# Altium PCB PCB1.PcbDoc (part 1 of 3)
Units mil, origin at the board's own origin, x right, y up, seen from the top; angles counter-clockwise.
Board outline 2560 x 1880 mil, 4 copper layers (Top Layer, GND, VCC, Bottom Layer), stack 23.756 mil thick; 154 components, 113 nets, 515 pads, 218 vias.
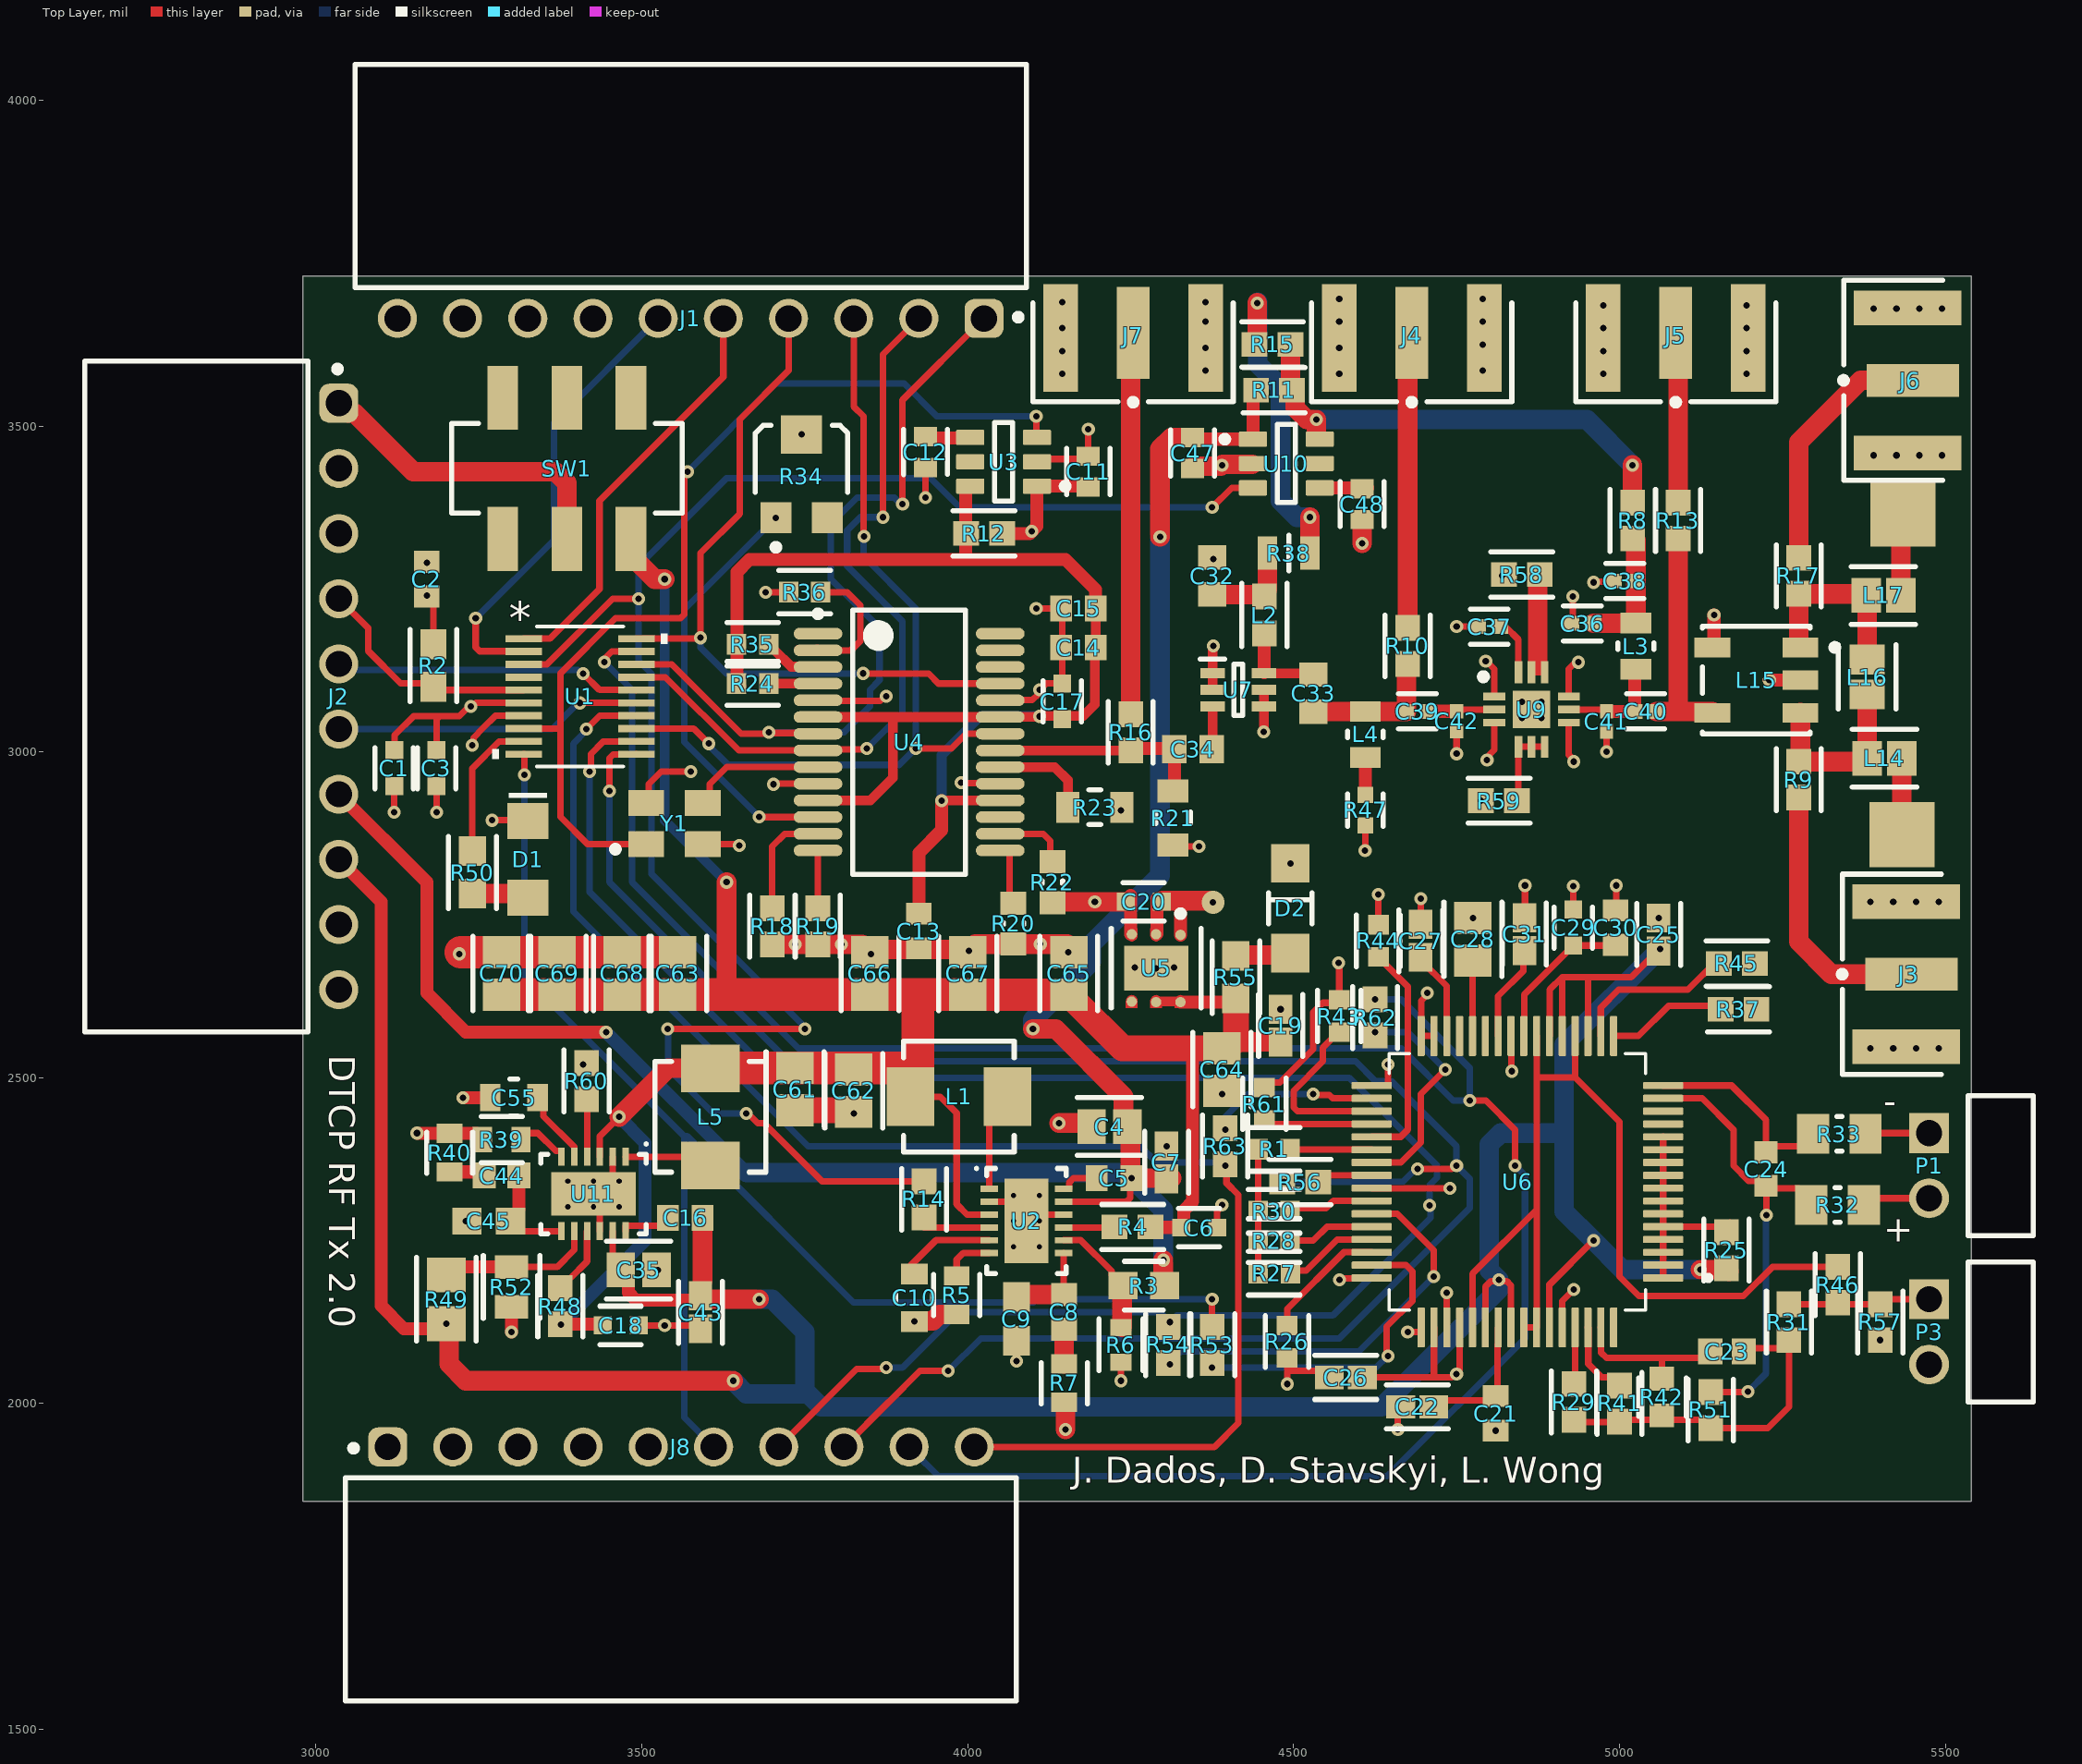
[diagram p0: Top Layer view]
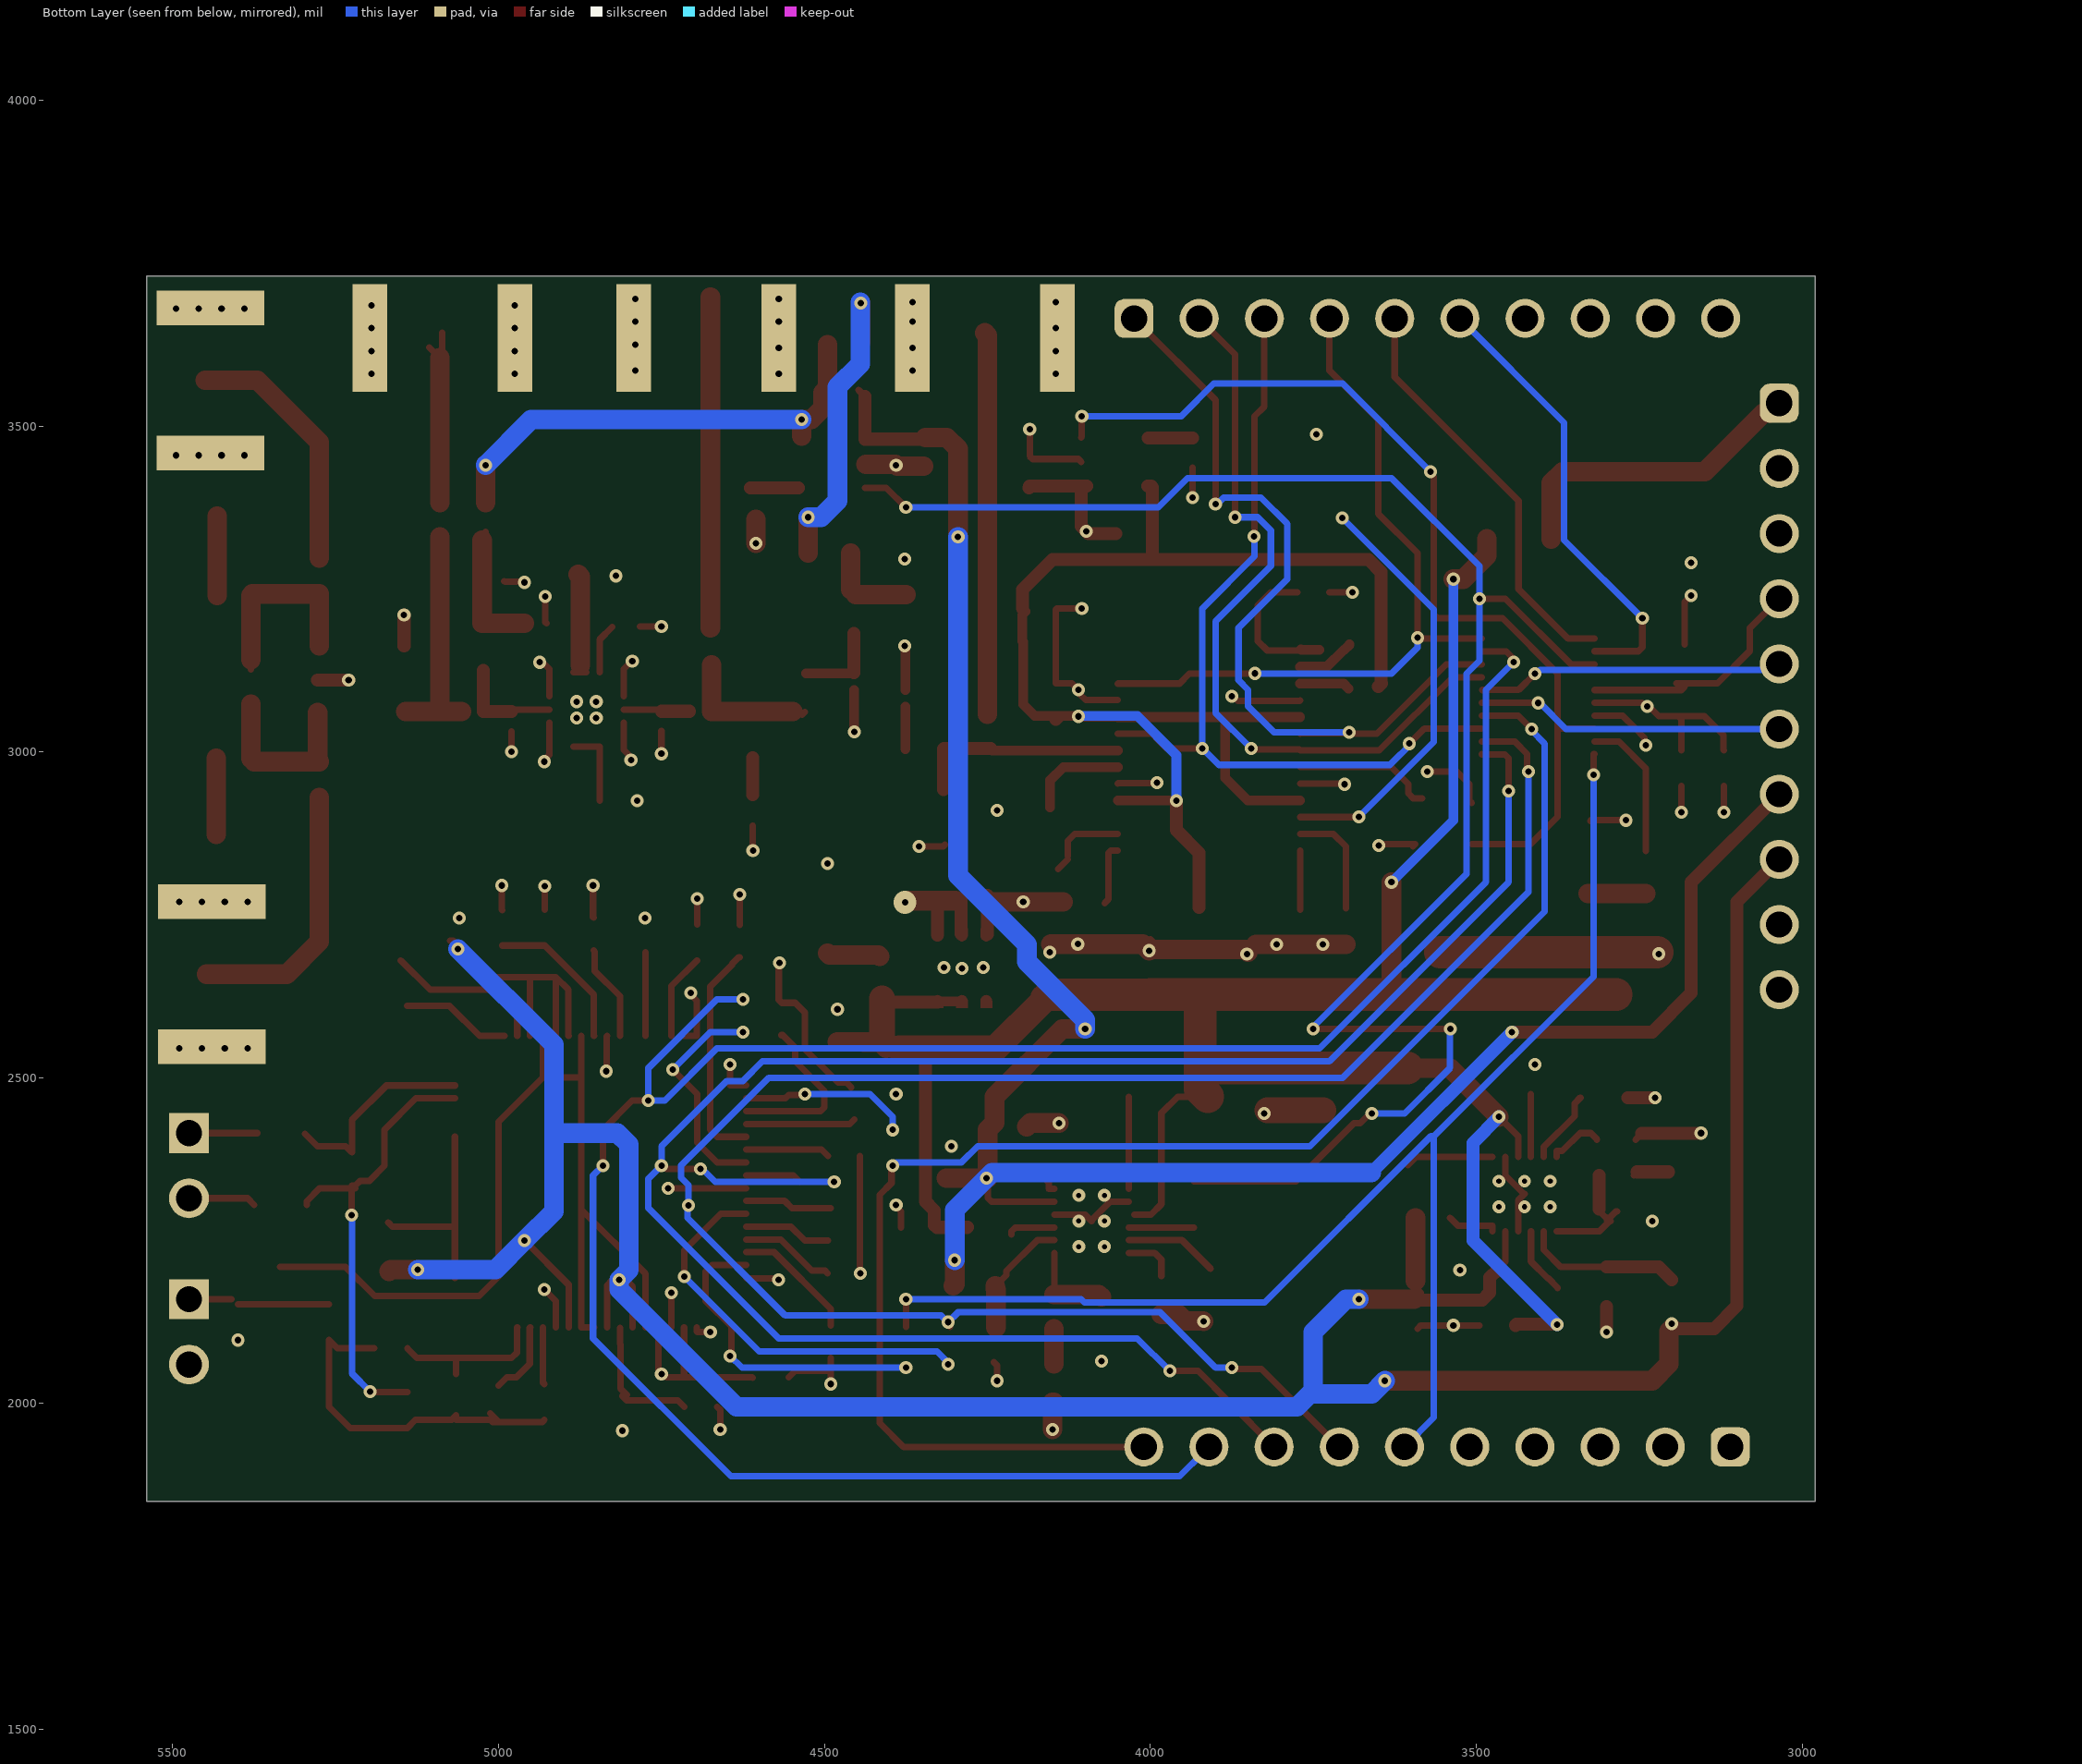
[diagram p1: Bottom Layer view, seen from below]
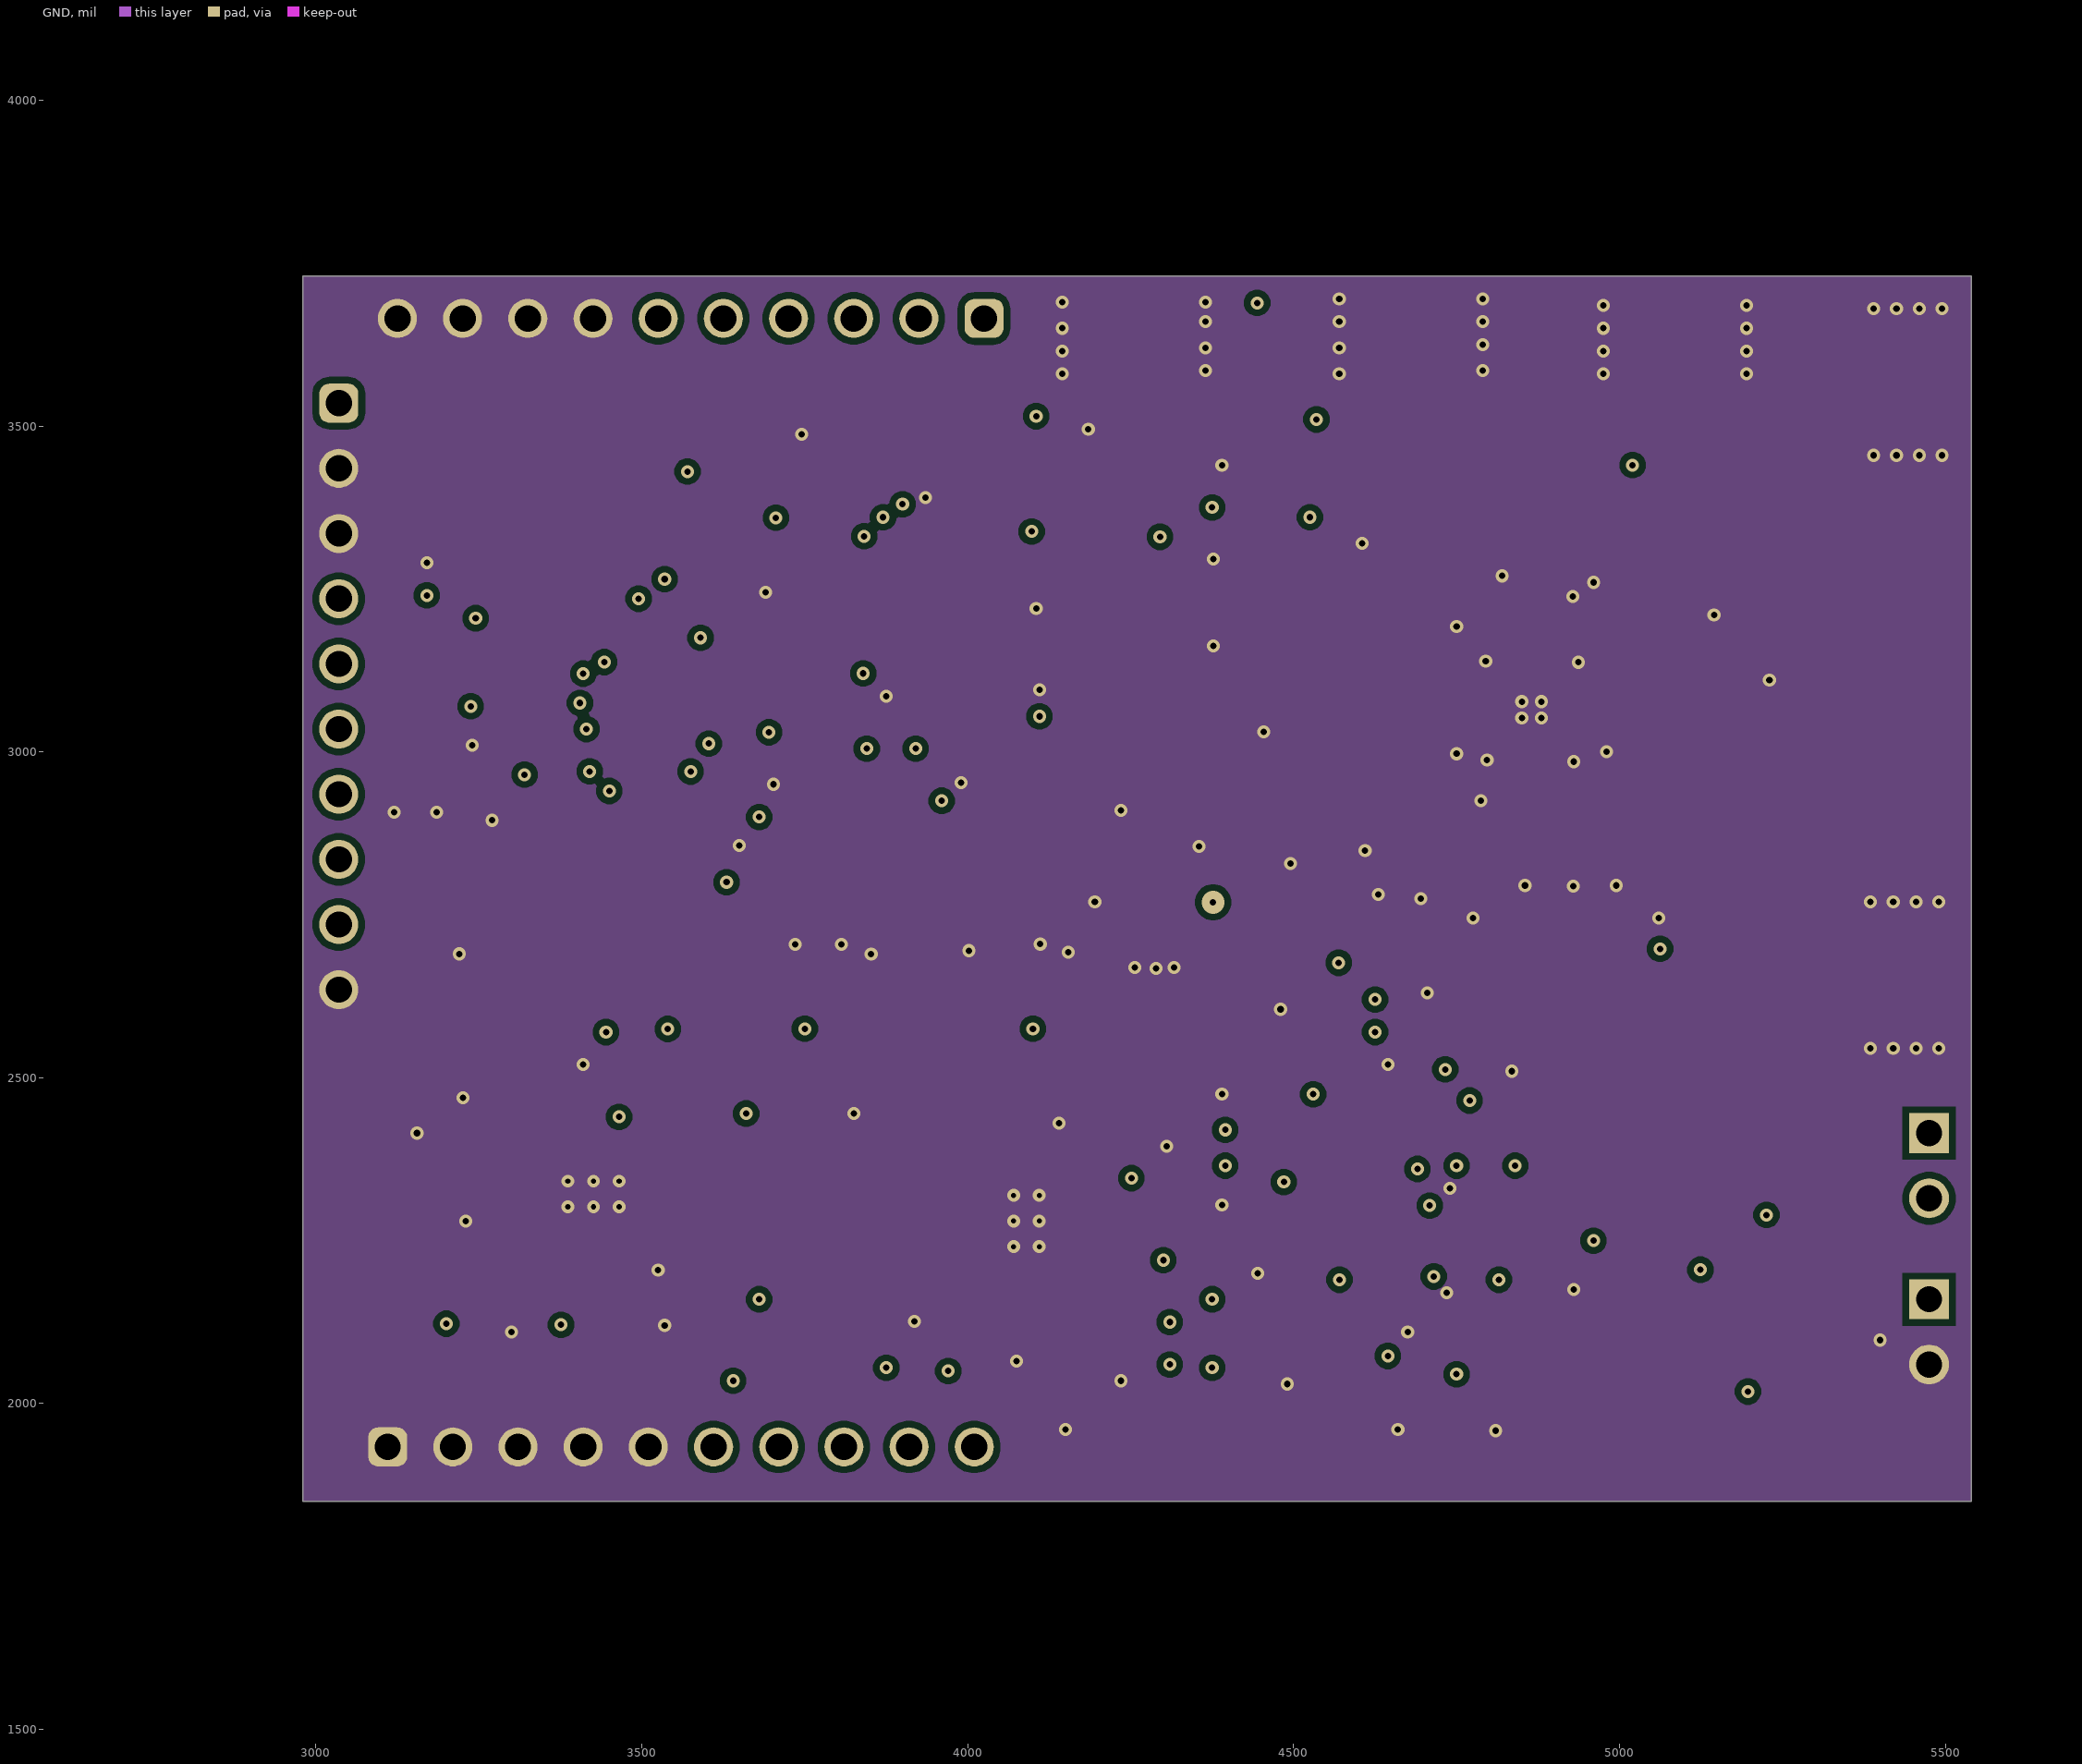
[diagram p2: GND]
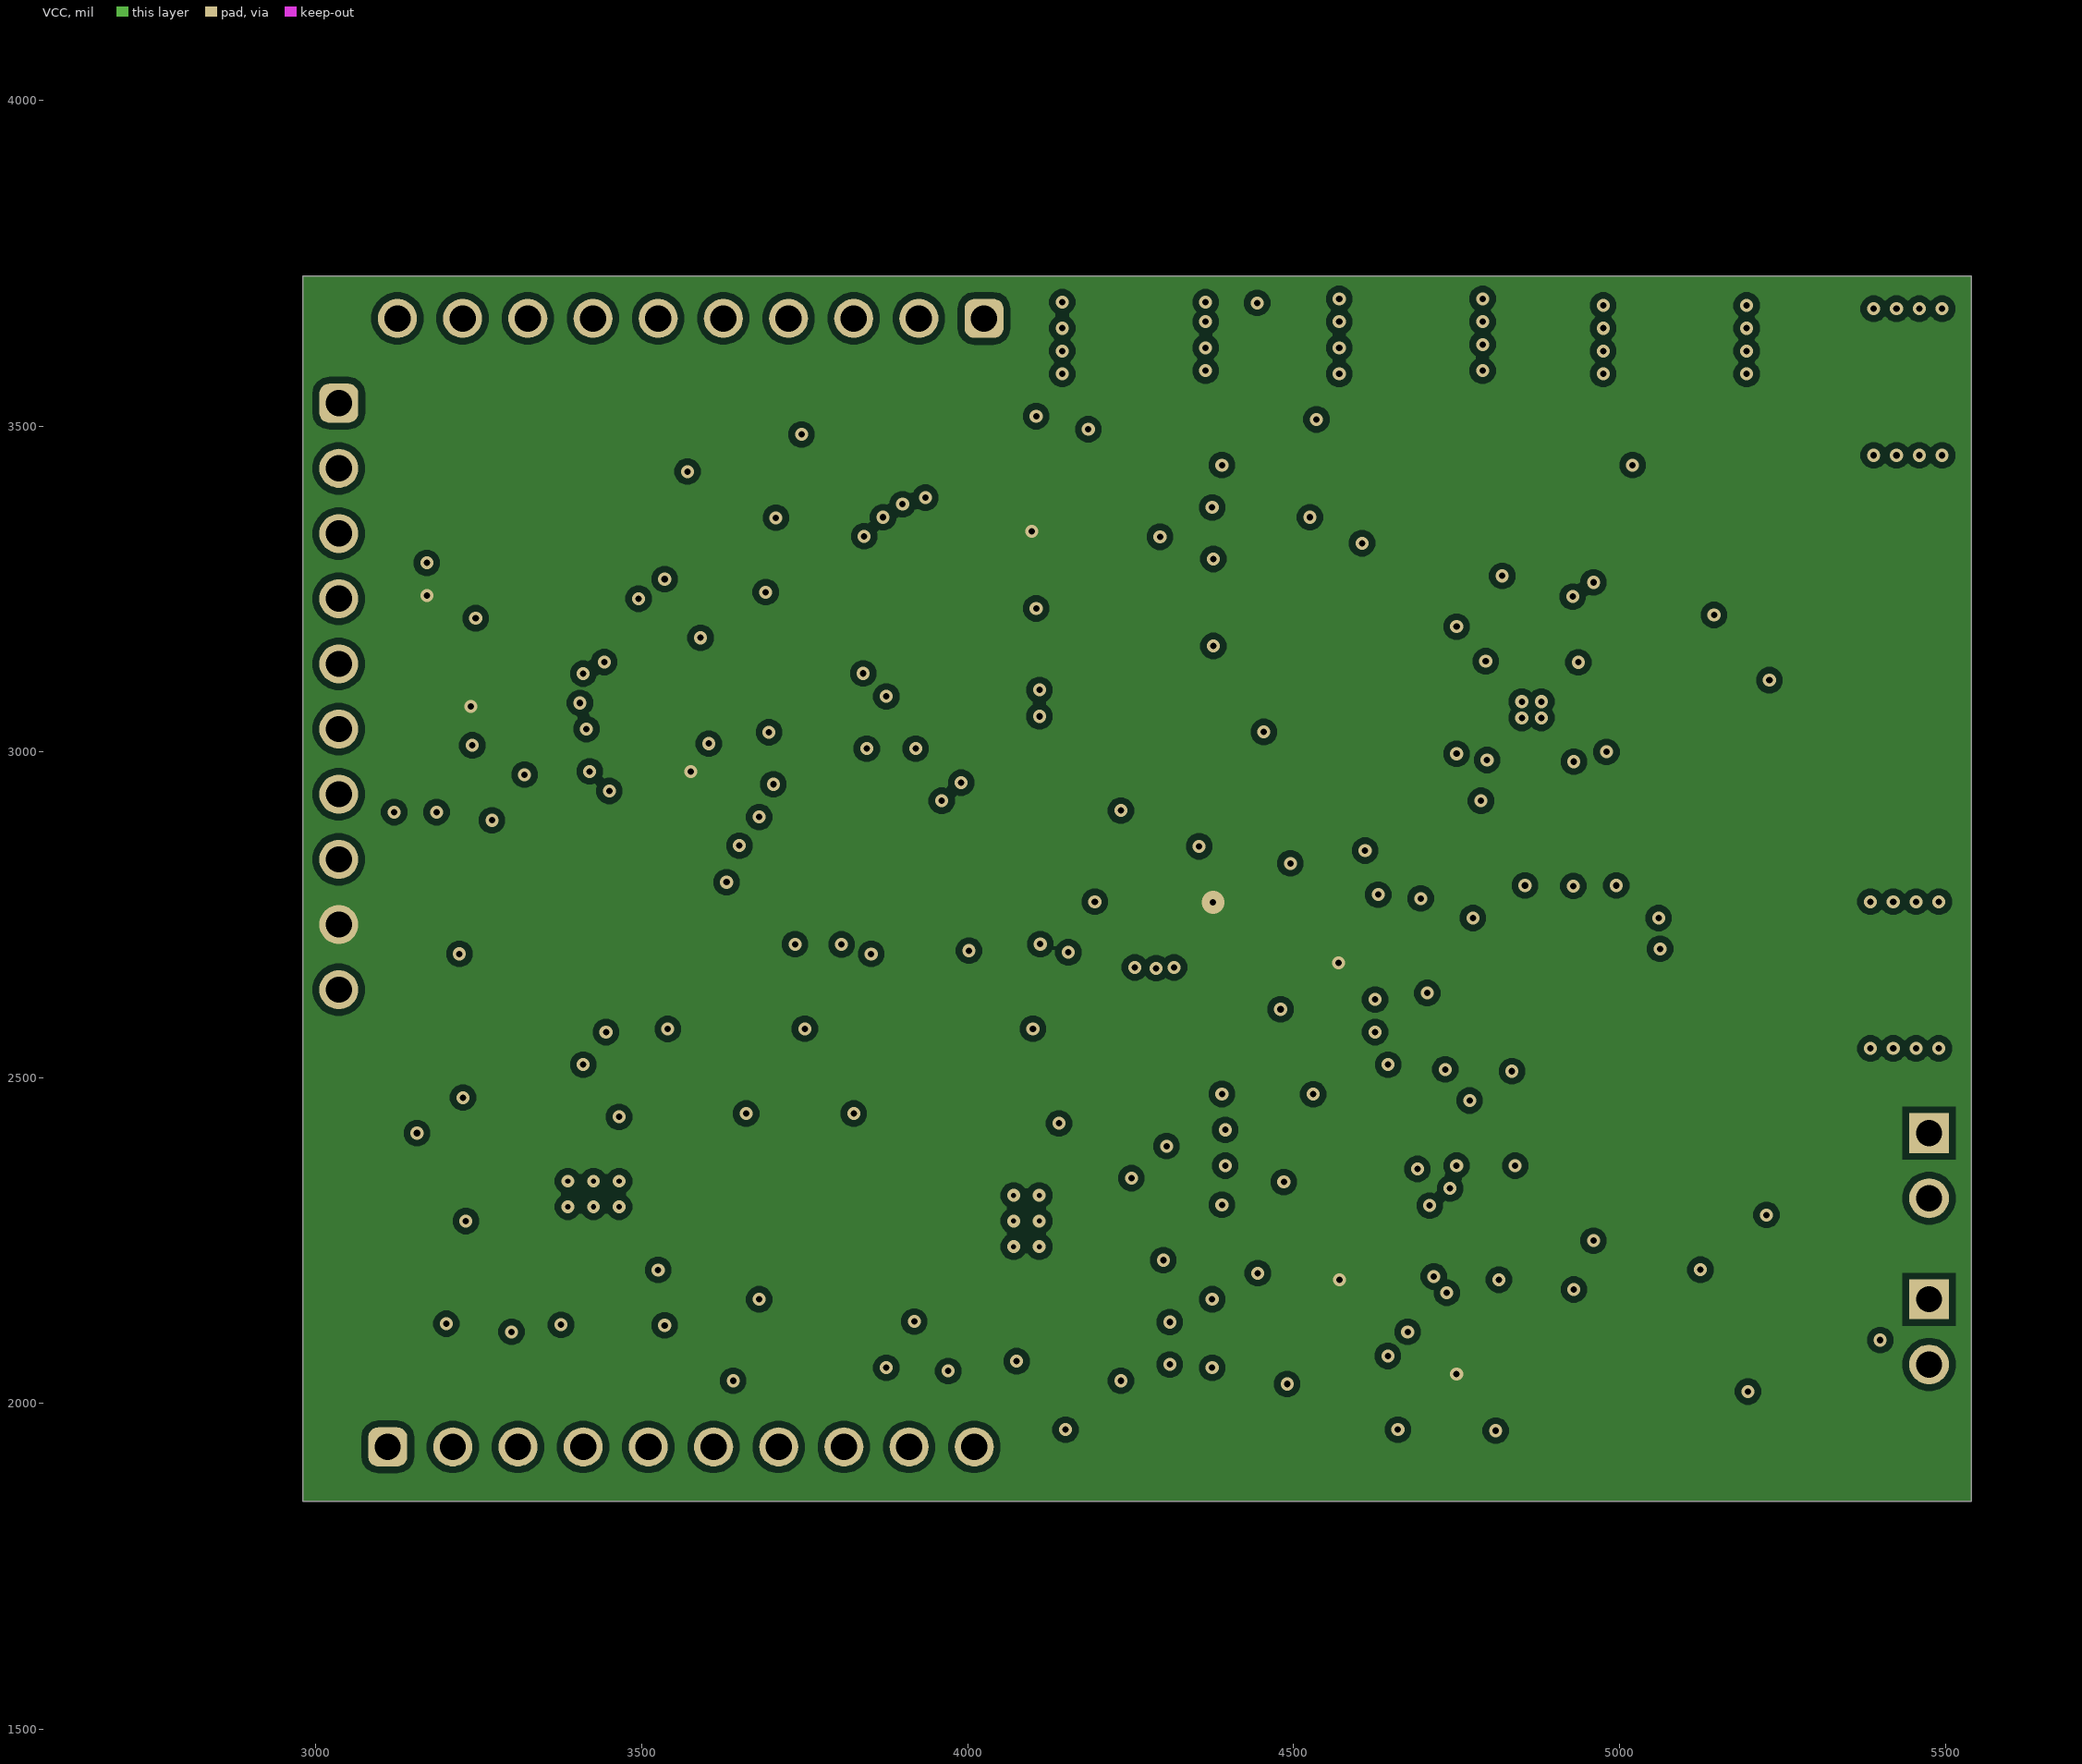
[diagram p3: VCC]
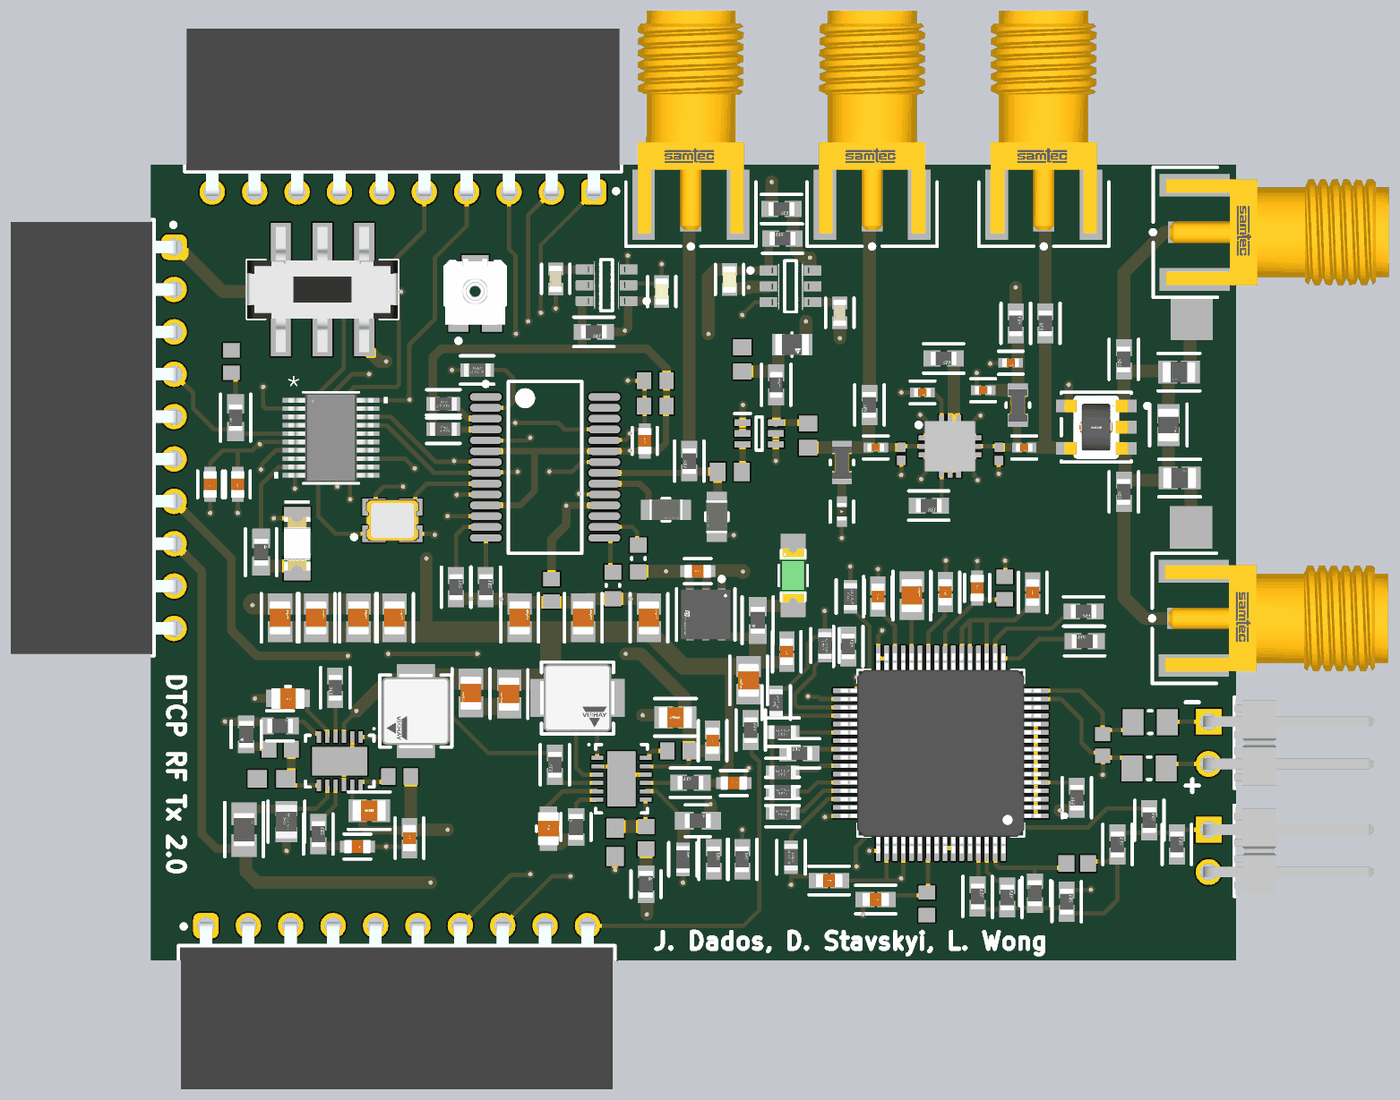
[diagram p5: 3D render of the assembled board from above, using the file's embedded part models]

## Layer stack, top to bottom
Top Solder: solder mask 0.4, Solder Resist, Dk 3.5
Top Layer: signal copper 1.4
Dielectric 2: prepreg 2.8, PP-006, Dk 4.1
GND: signal copper 1.378
Dielectric 1: dielectric 12.6, FR-4, Dk 4.8
VCC: signal copper 1.378
Dielectric 3: prepreg 2.8, PP-006, Dk 4.1
Bottom Layer: signal copper 1.4
Bottom Solder: solder mask 0.4, Solder Resist, Dk 3.5

## Board outline
2980,1850 2980,3730 5540,3730 5540,1850

## Design rules (kind name [scope] priority, off if disabled: settings)
Clearance [All] p1: gap=10 ignorepadtopadclearanceinfootprint=FALSE except(0: Arc-Hole Track-Hole SMDPad-Hole THPad-Hole Via-Hole Fill-Hole Poly-Hole Region-Hole Text-Hole; 2: SMDPad-SMDPad; 5: Arc-Arc Arc-Track Arc-SMDPad Track-Track Track-SMDPad; 20: Arc-Fill Arc-Poly Arc-Region Track-Fill Track-Poly Track-Region Fill-Fill Fill-Poly Fill-Region Poly-Poly Poly-Region Region-Region)
PlaneClearance [All] p1: clearance=40
PolygonConnect [All] p1: connectstyle=Direct reliefconductorwidth=10 reliefentries=4 polygonreliefangle="90 Angle" airgapwidth=10
RoutingVias [All] p1: holewidth=28 width=50 viastyle="Through Hole" minholewidth=28 minwidth=50 maxholewidth=28 maxwidth=50
SolderMaskExpansion [All] p1: expansion=4 istentingtop=FALSE
SupplyNets "Schematic Supply Nets_8" [InNet('3V3')] p1: voltage=0.000
SupplyNets "Schematic Supply Nets_7" [InNet('3V3DDS')] p2: voltage=0.000
SupplyNets "Schematic Supply Nets_6" [InNet('13V0')] p3: voltage=0.000
SupplyNets "Schematic Supply Nets_5" [InNet('13V0PA')] p4: voltage=0.000
SupplyNets "Schematic Supply Nets_4" [InNet('VBAT')] p5: voltage=0.000
SupplyNets "Schematic Supply Nets_3" [InNet('GND')] p6: voltage=0.000
SupplyNets "Schematic Supply Nets_2" [InNet('AFE_AGND')] p7: voltage=0.000
SupplyNets "Schematic Supply Nets_1" [InNet('PA1_VDD')] p8: voltage=0.000
SupplyNets "Schematic Supply Nets" [InNet('5V0')] p9: voltage=0.000
Width [All] p1: maxlimit=80 minlimit=10 preferedwidth=10
29 further rules are at their usual default settings.

## Classes and differential pairs
component class "U_Boost 5V": C16 C18 C35 C43 C44 C45 C55 L5 R39 R40 R48 R49 R52 R60 U11
component class U_Switch2: C47 C48 U10
component class U_Switch1: C11 C12 U3
component class "U_PA stage 2": C36 C37 C38 C39 C40 C41 C42 L3 L4 R47 R58 R59 U9
component class "U_PA stage 1": C32 C33 C34 L2 R38 U7
component class U_Output: L14 L15 L16 L17
component class U_LDO: C19 C20 U5
component class U_DDS: C13 C14 C15 C17 R18 R19 R20 R21 R22 R23 R24 R34 R35 R36 U4 Y1
component class U_AFE: C21 C22 C23 C24 C25 C26 C27 C28 C29 C30 C31 R1 R25 R26 R27 R28 R29 R30 R31 R32 R33 R37 R41 R42 R43 R44 R45 R46 R51 R53 R54 R56 R57 R61 R62 R63 U6
component class U_MCU: C1 C2 C3 D1 R2 R50 U1
component class System: C61 C62 C63 C64 C65 C66 C67 C68 C69 C70 D2 J1 J2 J3 J4 J5 J6 J7 J8 P1 P3 R8 R9 R10 R11 R12 R13 R15 R16 R17 R55 SW1
component class "U_Boost 12V": C4 C5 C6 C7 C8 C9 C10 L1 R3 R4 R5 R6 R7 R14 U2

## Components (designator, comment, footprint, x,y, rotation, side; value= is the part's Value field where it differs from the comment)
C1 "C1608X5R1A106K080AC" FP-C1608-080-0_1-MFG 3120,2975 r90 top
C2 "VJ0603Y104KXJAP" CAPC1608X92X38NL15T08 3170,3265 r270 top
C3 "C1608X5R1A106K080AC" FP-C1608-080-0_1-MFG 3185,2975 r90 top
C4 "CC0805MKX5R8BB226" FP-CC0805-0_2-1_45-IPC_C 4217.41,2425 r180 top
C5 "VJ0603Y104KXJAP" CAPC1608X92X38NL15T08 4224.57,2345.87 r0 top
C6 "C1608X5R1A106K080AC" FP-C1608-080-0_1-MFG 4355,2270 r180 top
C7 "C1608X5R1H105K080AB" FP-C1608-080-0_1-IPC_B 4305,2370 r90 top
C8 "C0603C331J5GALTU" CAPC1608X87X35NL15T15 4147.99,2140.87 r90 top
C9 "VJ0603A100KXAAC" CAPC1608X92X38ML12T08 4075,2130 r90 top
C10 "C2012X5R1E475K125AB" FP-C2012-125-0_2-MFG 3917.99,2162.28 r270 top
C11 "C0603C106M8PACTU" FP-C0603C106M8PACTU-MFG 4185,3430 r270 top
C12 "C0603C101K4GAC7867" FP-C0603C-CF-MFG 3935,3460 r90 top value="100 pF"
C13 "VJ0603Y104KXJAP" CAPC1608X92X38NL15T08 3925,2725 r90 top
C14 "VJ0603Y104KXJAP" CAPC1608X92X38NL15T08 4170,3160 r0 top
C15 "VJ0603Y104KXJAP" CAPC1608X92X38NL15T08 4170,3220 r0 top
C16 "VJ0603Y104KXJAP" CAPC1608X92X38NL15T08 3566.57,2285 r0 top
C17 "C1608X5R1A106K080AC" FP-C1608-080-0_1-MFG 4145,3077.44 r270 top
C18 "C1608X5R1A106K080AC" FP-C1608-080-0_1-MFG 3467.44,2120 r180 top
C19 "C1608X5R1H105K080AB" FP-C1608-080-0_1-IPC_B 4480,2580 r90 top
C20 "C1608X5R1A106K080AC" FP-C1608-080-0_1-MFG 4270,2770 r0 top
C21 "VJ0603Y104KXJAP" CAPC1608X92X38NL15T08 4810,1985 r270 top
C22 "C1608X5R1H105K080AB" FP-C1608-080-0_1-IPC_B 4689.78,1995 r180 top
C23 "VJ0603Y152JXACW1BC" CAPC1608X95X40NL15T15 5165,2080 r180 top
C24 "06035C472KAZ2A" CAPC1608X90X35LL15T15 5225,2360 r90 top
C25 "C1608X5R1H105K080AB" FP-C1608-080-0_1-IPC_B 5060,2719.78 r90 top
C26 "C1608X5R1H105K080AB" FP-C1608-080-0_1-IPC_B 4580,2040 r180 top
C27 "C1608X5R1H105K080AB" FP-C1608-080-0_1-IPC_B 4695,2710 r90 top
C28 "GRM21BR60J107ME15K" FP-GRM21B-0_2-e0_2_0_7-IPC_B 4775,2712.51 r90 top
C29 "C1608X5R1A106K080AC" FP-C1608-080-0_1-MFG 4929.1,2730.39 r270 top
C30 "VJ0603Y104KXJAP" CAPC1608X92X38NL15T08 4994.1,2730.39 r270 top
C31 "C1608X5R1H105K080AB" FP-C1608-080-0_1-IPC_B 4854.1,2720.39 r90 top
C32 "VJ0603Y183KXAAC" CAPC1608X92X38ML15T08 4375,3270 r90 top
C33 "VJ0603Y183KXAAC" CAPC1608X92X38ML15T08 4530,3090 r270 top
C34 "VJ0603Y183KXAAC" CAPC1608X92X38ML15T08 4345.59,3004.41 r0 top
C35 "CC0805MKX5R8BB226" FP-CC0805-0_2-1_45-IPC_C 3495,2205 r0 top
C36 "GRM155R71H104KE14D" FP-GRM155-0_05-IPC_B 4943.21,3197.09 r0 top
C37 "GRM155R71H104KE14D" FP-GRM155-0_05-IPC_B 4800.08,3192.09 r0 top
C38 "GRM1555C1H102JA01D" FP-GRM155-0_05-IPC_B 5008.21,3262.09 r0 top
C39 "GRM1555C1H102JA01D" FP-GRM155-0_05-IPC_B 4690.08,3062.09 r0 top
C40 "GRM1555C1H102JA01D" FP-GRM155-0_05-IPC_B 5040.08,3062.09 r0 top
C41 "GRM1555C1HR40WA01D" CAPC1005X55X25LL05T10 4980.08,3046.73 r90 top
C42 "GRM1555C1HR40WA01D" CAPC1005X55X25LL05T10 4750.08,3047.09 r90 top
C43 "C1608X5R1H105K080AB" FP-C1608-080-0_1-IPC_B 3590,2140 r270 top
C44 "C0603C331J5GALTU" CAPC1608X87X35NL15T15 3285,2350 r0 top
C45 "VJ0603A100KXAAC" CAPC1608X92X38ML12T08 3265,2280 r0 top
C47 "C0603C106M8PACTU" FP-C0603C106M8PACTU-MFG 4345,3458.62 r90 top
C48 "C0603C101K4GAC7867" FP-C0603C-CF-MFG 4605,3380 r90 top value="100 pF"
C55 "C2012X5R1E475K125AB" FP-C2012-125-0_2-MFG 3303.58,2469.49 r180 top
C61 "GRM21BR60J107ME15K" FP-GRM21B-0_2-e0_2_0_7-IPC_B 3735,2482.51 r270 top
C62 "GRM21BR60J107ME15K" FP-GRM21B-0_2-e0_2_0_7-IPC_B 3825,2480 r270 top
C63 "GRM21BR60J107ME15K" FP-GRM21B-0_2-e0_2_0_7-IPC_B 3555,2660 r90 top
C64 "GRM21BR60J107ME15K" FP-GRM21B-0_2-e0_2_0_7-IPC_B 4390,2512.51 r270 top
C65 "GRM21BR60J107ME15K" FP-GRM21B-0_2-e0_2_0_7-IPC_B 4155,2660 r90 top
C66 "GRM21BR60J107ME15K" FP-GRM21B-0_2-e0_2_0_7-IPC_B 3850,2660 r90 top
C67 "GRM21BR60J107ME15K" FP-GRM21B-0_2-e0_2_0_7-IPC_B 4000,2660 r90 top
C68 "GRM21BR60J107ME15K" FP-GRM21B-0_2-e0_2_0_7-IPC_B 3470,2660 r90 top
C69 "GRM21BR60J107ME15K" FP-GRM21B-0_2-e0_2_0_7-IPC_B 3370,2660 r90 top
C70 "GRM21BR60J107ME15K" FP-GRM21B-0_2-e0_2_0_7-IPC_B 3285,2660 r90 top
D1 "150120SS75000" WL-SMCW_1206_150120xx75000 3325,2835 r270 top
D2 "HSMG-C150" FP-HSMG-C150-MFG 4495,2760 r270 top
J1 "613010143121" 613010143121 3575,3883.51 r180 top
J2 "613010143121" 613010143121 2816.49,3085 r270 top
J3 "SMA-J-P-H-ST-EM1" FP-SMA-J-P-H-ST-EM1-MFG 5710.08,2658.78 r90 top
J4 "SMA-J-P-H-ST-EM1" FP-SMA-J-P-H-ST-EM1-MFG 4681.22,3905.08 r180 top
J5 "SMA-J-P-H-ST-EM1" FP-SMA-J-P-H-ST-EM1-MFG 5086.22,3905.08 r180 top
J6 "SMA-J-P-H-ST-EM1" FP-SMA-J-P-H-ST-EM1-MFG 5712.2,3570 r90 top
J7 "SMA-J-P-H-ST-EM1" FP-SMA-J-P-H-ST-EM1-MFG 4253.78,3905.08 r180 top
J8 "613010143121" 613010143121 3560,1715 r0 top
L1 "IHLP1616BZER4R7M11" FP-IHLP-1616BZ-FP_1_8545x-MFG 3986.34,2470.87 r0 top
L2 "LQM18NNR82K00D" FP-LQM18NN_00-IPC_B 4455,3210 r90 top
L3 "0805LS-152XJEC" FP-LQW21HN_00-MFG 5025.08,3162.09 r90 top
L4 "LQW21HN1R5J00L" FP-LQW21HN_00-MFG 4610.08,3026.65 r90 top
L5 "IHLP1616BZER4R7M11" FP-IHLP-1616BZ-FP_1_8545x-MFG 3605,2440 r270 top
L14 "MLZ2012M1R0HTD25" FP-MLZ2012-1_25-IPC_C 5406.61,2990 r0 top
L15 "MABAES0060" FP-MABAES0060-MFG 5210,3110 r0 top
L16 "MLZ2012M1R0HTD25" FP-MLZ2012-1_25-IPC_C 5380,3115 r270 top
L17 "MLZ2012M1R0HTD25" FP-MLZ2012-1_25-IPC_C 5405,3240 r180 top
P1 "TSW-102-08-G-S-RA" SMTC-TSW-102-08-X-S-RA 5475,2415 r270 top
P3 "TSW-102-08-G-S-RA" SMTC-TSW-102-08-X-S-RA 5475,2160 r270 top
R1 "CRGCQ0603J10K" FP-CRGCQ0603-IPC_C 4470,2390 r180 top value=10KΩ
R2 "ESR03EZPF3301" FP-ESR03-IPC_A 3180,3132.44 r90 top
R3 "RN73H1JTTD1113D25" FP-CRCW0603-e3-IPC_A 4270.09,2180.87 r0 top
R4 "RMCF0603ZG0R00" FP-RMCF0603-IPC_B 4252.99,2270.87 r180 top
R5 "CRCW060357K6FKEA" FP-CRCW0603-e3-MFG 3982.99,2166.34 r90 top
R6 "AC0603FR-1311K3L" FP-AC0603-IPC_C 4235,2090 r90 top
R7 "CRCW060386K6FKEAHP" FP-CRCW0603-HPe3-MFG 4147.99,2031.34 r90 top
R8 "RMCF0603ZG0R00" FP-RMCF0603-IPC_B 5020,3355 r90 top
R9 "RMCF0603ZG0R00" FP-RMCF0603-IPC_B 5275,2957.4 r270 top
R10 "RMCF0603ZG0R00" FP-RMCF0603-IPC_B 4675,3162.6 r270 top
R11 "DNF" FP-RMCF0603-IPC_B 4470,3555 r180 top
R12 "DNF" FP-RMCF0603-IPC_B 4025,3335 r0 top
R13 "RMCF0603ZG0R00" FP-RMCF0603-IPC_B 5090,3355 r270 top
R14 "RMCF0603ZG0R00" FP-RMCF0603-IPC_B 3932.99,2313.26 r270 top
R15 "RMCF0603ZG0R00" FP-RMCF0603-IPC_B 4467.6,3625 r0 top
R16 "RMCF0603ZG0R00" FP-RMCF0603-IPC_B 4250,3030 r270 top
R17 "RMCF0603ZG0R00" FP-RMCF0603-IPC_B 5275,3270 r270 top
R18 "DNF" FP-RMCF0603-IPC_B 3700,2732.4 r90 top
R19 "DNF" FP-RMCF0603-IPC_B 3770,2732.4 r90 top
R20 "DNF" RESC0603(1608)_N 4070,2736.5 r270 top value="100000.00 Ohm"
R21 "AC0805JR-0782RL" FP-AC0805-MFG 4315,2898.66 r270 top value=82Ω
R22 "DNF" RESC0603(1608)_N 4130,2800 r270 top value="100000.00 Ohm"
R23 "AC0805JR-0782RL" FP-AC0805-MFG 4195,2915 r0 top value=82Ω
R24 "CRGCQ0603J10K" FP-CRGCQ0603-IPC_C 3670,3105 r0 top value=10KΩ
R25 "RMCF0603ZG0R00" FP-RMCF0603-IPC_B 5164.1,2235.39 r270 top
R26 "CRGCQ0603J10K" FP-CRGCQ0603-IPC_C 4490,2095 r270 top value=10KΩ
R27 "CRGCQ0603J10K" FP-CRGCQ0603-IPC_C 4470.32,2200 r180 top value=10KΩ
R28 "CRGCQ0603J10K" FP-CRGCQ0603-IPC_C 4470,2250 r180 top value=10KΩ
R29 "RMCF0603ZG0R00" FP-RMCF0603-IPC_B 4930,2002.4 r90 top
R30 "CRGCQ0603J10K" FP-CRGCQ0603-IPC_C 4470,2295 r180 top value=10KΩ
R31 "DNF" FP-RMCF0603-IPC_B 5260,2125 r90 top
R32 "CRCW08055K00FKTA" RESC2013X50X30ML20T20 5334.65,2305 r180 top
R33 "CRCW08055K00FKTA" RESC2013X50X30ML20T20 5337.23,2413.77 r180 top
R34 "TC33X-2-103E" BOUR-TC33X-2_V 3745,3430 r90 top
R35 "CRGCQ0603J10K" FP-CRGCQ0603-IPC_C 3670,3165 r0 top value=10KΩ
R36 "CRGCQ0603J10K" FP-CRGCQ0603-IPC_C 3749.68,3245 r0 top value=10KΩ
R37 "RMCF0603ZG0R00" FP-RMCF0603-IPC_B 5182.6,2605 r180 top
R38 "MCU08050C5109FP500" FP-MCU0805-IPC_C 4492.45,3305 r0 top
R39 "CRCW060357K6FKEA" FP-CRCW0603-e3-MFG 3285,2405 r0 top
R40 "CRCW060386K6FKEAHP" FP-CRCW0603-HPe3-MFG 3205,2385 r270 top
R41 "RMCF0603ZG0R00" FP-RMCF0603-IPC_B 5000,2000 r90 top
R42 "CRCW06031M00JNEA" FP-CRCW0603-e3-IPC_B 5065,2010 r90 top
R43 "CRGCQ0603J10K" FP-CRGCQ0603-IPC_C 4570,2594.68 r90 top value=10KΩ
R44 "CRGCQ0603J10K" FP-CRGCQ0603-IPC_C 4630,2710 r90 top value=10KΩ
R45 "RMCF0603ZG0R00" FP-RMCF0603-IPC_B 5180,2675 r0 top
R46 "DNF" FP-RMCF0603-IPC_B 5335,2182.4 r90 top
R47 "FCHP0402E50R0BBT1" FP-FC0402-MFG 4610.08,2910.59 r90 top
R48 "RMCF0603ZG0R00" FP-RMCF0603-IPC_B 3375,2149.49 r90 top
R49 "TFCR0805-10W-E-4222BT-1K" FP-TFCR0805-IPC_A 3200,2160 r270 top
R50 "CRCW0603220RFKEAHP" FP-CRCW0603-HPe3-IPC_A 3240,2815 r90 top
R51 "RMCF0603ZG0R00" FP-RMCF0603-IPC_B 5140,1990 r90 top
R52 "CRGP0805F10K" FP-CRGP0805-IPC_C 3300,2178.93 r90 top value=10KΩ
R53 "RMCF0603ZG0R00" FP-RMCF0603-IPC_B 4375,2090 r90 top
R54 "RMCF0603ZG0R00" FP-RMCF0603-IPC_B 4307.5,2090 r90 top
R55 "CRCW0603220RFKEAHP" FP-CRCW0603-HPe3-IPC_A 4411.41,2654.17 r270 top
R56 "RMCF0603ZG0R00" FP-RMCF0603-IPC_B 4510,2340 r180 top
R57 "DNF" FP-RMCF0603-IPC_B 5400,2125 r90 top
R58 "RMCF0603ZG0R00" FP-RMCF0603-IPC_B 4850.08,3272.09 r0 top
R59 "RMCF0603ZG0R00" FP-RMCF0603-IPC_B 4815,2925 r0 top
R60 "RMCF0603ZG0R00" FP-RMCF0603-IPC_B 3415,2495 r270 top
R61 "CRGCQ0603J10K" FP-CRGCQ0603-IPC_C 4455,2460 r90 top value=10KΩ
R62 "RMCF0603ZG0R00" FP-RMCF0603-IPC_B 4625,2592.4 r90 top
R63 "RMCF0603ZG0R00" FP-RMCF0603-IPC_B 4395,2395 r90 top
SW1 "452406020024" 452406020024 3385,3435 r180 top
U1 "MSPM0C1104SDGS20R" DGS0020A_TEX 3405,3085 r0 top
U2 "LTC3122EDE#PBF" LT-DE-UE-12_V 4090.08,2280.08 r0 top
U3 "TPS22810TDBVRQ1" FP-DBV0006A-MFG 4055,3445 r180 top
U4 "AD9850BRSZ-REEL" ADI-RS-28_N 3910,3015 r0 top
U5 "LD39200PU33R" FP-DFN6-7946637-MFG 4289.01,2667.99 r270 top
U6 "ADS1299-4PAG" QFP50P1200X1200X120-64N 4843.31,2340.39 r180 top
U7 "TQP369184" SOT65P210X110-6N 4415,3095 r0 top
U9 "PMA3-43-1W+" QFN51P300X300X89-13N 4865,3065 r0 top
U10 "TPS22810TDBVRQ1" FP-DBV0006A-MFG 4488.82,3442.4 r0 top
U11 "LTC3122EDE#PBF" LT-DE-UE-12_V 3425.79,2321.57 r270 top
Y1 "830207044109" WE-SPXO_CFPS-39 3550,2890 r0 top

## Footprints (in the part's own frame and the unit in brackets; to place one, negate y for a bottom-side part, rotate by r counter-clockwise, add the part's x,y. Pads: shape width x height; smd on the part's side, far side on the other; paste and mask are expansions set on the pad)
452406020024 [mm] "SMT Mini Slide Switch, Same Side Connection, body 9.00 x 3.50 mm"
  rect 1.2x2.5 smd: 1(2.5,2.75) 2(0,2.75) 3(-2.5,2.75) 4(2.5,-2.75) 5(0,-2.75) 6(-2.5,-2.75)
  silkscreen extent -4.5,-1.75 4.5,1.75, body extent -4.52,-3.75 4.52,3.75, height 5.5
613010143121 [mm] "Socket Header, Pitch 2.54 mm, THT, Angled, single row, 10p"
  rrect50% 1.52x1.52 hole 1.02: 1(-11.43,5.55)
  round 1.52 hole 1.02: 2(-8.89,5.55) 3(-6.35,5.55) 4(-3.81,5.55) 5(-1.27,5.55) 6(1.27,5.55) 7(3.81,5.55) 8(6.35,5.55) 9(8.89,5.55) 10(11.43,5.55)
  silkscreen extent -13.08,-4.35 13.08,5.62, body extent -12.95,-4.25 12.95,5.75, height 2.55
ADI-RS-28_N [mm] "SOP, 28-Leads, Body 10.2x5.3mm, Pitch 0.65mm, IPC Medium Density"
  oval 1.9x0.45 smd: 1(-3.55,4.225) 2(-3.55,3.575) 3(-3.55,2.925) 4(-3.55,2.275) 5(-3.55,1.625) 6(-3.55,0.975) 7(-3.55,0.325) 8(-3.55,-0.325) 9(-3.55,-0.975) 10(-3.55,-1.625) 11(-3.55,-2.275) 12(-3.55,-2.925) 13(-3.55,-3.575) 14(-3.55,-4.225) 15(3.55,-4.225) 16(3.55,-3.575) 17(3.55,-2.925) 18(3.55,-2.275) 19(3.55,-1.625) 20(3.55,-0.975) 21(3.55,-0.325) 22(3.55,0.325) 23(3.55,0.975) 24(3.55,1.625) 25(3.55,2.275) 26(3.55,2.925) 27(3.55,3.575) 28(3.55,4.225)
  silkscreen extent -3.67,-5.15 2.2,5.15, body extent -2.69,-5.17 2.69,5.17, height 1.98
BOUR-TC33X-2_V [mm] "SMD, 3-Leads, Body 3.8x3.6mm"
  rect 1.2x1.2 smd: 1(-1.8,1) 3(-1.8,-1)
  rect 1.5x1.6 smd: 2(1.45,0)
  silkscreen extent -3.07,-1.8 1.8,1.8, body extent -2,-1.8 1.96,1.8, height 1.15
CAPC1005X55X25LL05T10 [mm] "Chip Capacitor, 2-Leads, Body 1.00x0.50mm, IPC High Density"
  rect 0.56x0.52 smd: 1(-0.39,0) 2(0.39,0)
  body extent -0.53,-0.28 0.53,0.28, height 0.55
CAPC1608X87X35NL15T15 [mm] "Chip Capacitor, 2-Leads, Body 1.60x0.80mm, IPC Medium Density"
  rect 0.9x1 smd: 1(-0.675,0) 2(0.675,0)
  body extent -0.87,-0.48 0.87,0.47, height 0.87
CAPC1608X90X35LL15T15 [mm] "Chip Capacitor, 2-Leads, Body 1.60x0.81mm, IPC High Density"
  rect 0.85x0.9 smd: 1(-0.65,0) 2(0.65,0)
  body extent -0.88,-0.48 0.87,0.48, height 0.9
CAPC1608X92X38ML12T08 [mm] "Chip Capacitor, 2-Leads, Body 1.60x0.80mm, IPC Low Density"
  rect 1.15x1.05 smd: 1(-0.85,0) 2(0.85,0)
  body extent -0.86,-0.46 0.86,0.46, height 0.92
CAPC1608X92X38ML15T08 [mm] "Chip Capacitor, 2-Leads, Body 1.60x0.80mm, IPC Low Density"
  rect 0.95x1.1 smd: 1(-0.725,0) 2(0.725,0)
  body extent -0.87,-0.48 0.87,0.47, height 0.92
CAPC1608X92X38NL15T08 [mm] "Chip Capacitor, 2-Leads, Body 1.60x0.80mm, IPC Medium Density"
  rect 0.85x1 smd: 1(-0.675,0) 2(0.675,0)
  body extent -0.87,-0.48 0.87,0.47, height 0.92
CAPC1608X95X40NL15T15 [mm] "Chip Capacitor, 2-Leads, Body 1.60x0.80mm, IPC Medium Density"
  rect 0.95x1 smd: 1(-0.65,0) 2(0.65,0)
  body extent -0.88,-0.48 0.87,0.47, height 0.95
DGS0020A_TEX [mil]
  rect 56x11 smd paste+0 mask+0: 1(-86.5,88.58) 2(-86.5,68.9) 3(-86.5,49.21) 4(-86.5,29.53) 5(-86.5,9.84) 6(-86.5,-9.84) 7(-86.5,-29.53) 8(-86.5,-49.21) 9(-86.5,-68.9) 10(-86.5,-88.58) 11(86.5,-88.58) 12(86.5,-68.9) 13(86.5,-49.21) 14(86.5,-29.53) 15(86.5,-9.84) 16(86.5,9.84) 17(86.5,29.53) 18(86.5,49.21) 19(86.5,68.9) 20(86.5,88.58)
  silkscreen extent -134,-108 134,108, body extent -101,-103 101,103, height 43
FP-AC0603-IPC_C [mil]
  rect 25.93x31.97 smd paste+0 mask+0: 1(-26.64,0) 2(26.64,0)
  silkscreen extent -40,-33 40,33, body extent -44,-22 44,22, height 10
FP-AC0805-MFG [mm]
  rect 0.9x1.2 smd paste+0 mask+0: 1(-1.05,0) 2(1.05,0)
  silkscreen extent -0.23,-0.67 0.23,0.67, body extent -1.6,-0.77 1.6,0.77, height 0.25
FP-C0603C106M8PACTU-MFG [mm]
  rect 0.75x0.9 smd paste+0 mask+0: 1(-0.6,0) 2(0.6,0)
  silkscreen extent -0.9,-0.85 0.9,0.85, body extent -1.2,-0.6 1.2,0.6, height 0.25
FP-C0603C-CF-MFG [mm]
  rect 0.75x0.9 smd paste+0 mask+0: 1(-0.6,0) 2(0.6,0)
  silkscreen extent -0.87,-0.85 0.88,0.85, body extent -1.2,-0.6 1.2,0.6, height 0.25
FP-C1608-080-0_1-IPC_B [mil]
  rect 44.53x35.91 smd paste+0 mask+0: 1(-25.22,0) 2(25.22,0)
  silkscreen extent -47,-34 47,34, body extent -57,-28 57,28, height 10
FP-C1608-080-0_1-MFG [mm]
  rect 0.7x0.7 smd paste+0 mask+0: 1(-0.7,0) 2(0.7,0)
  silkscreen extent -0.8,-0.75 0.8,0.75, body extent -1.15,-0.55 1.15,0.55, height 0.25
FP-C2012-125-0_2-MFG [mm]
  rect 0.8x1.05 smd paste+0 mask+0: 1(-0.925,0) 2(0.925,0)
  silkscreen extent -0.15,-0.72 0.15,0.72, body extent -1.43,-0.82 1.43,0.82, height 0.25
FP-CC0805-0_2-1_45-IPC_C [mil]
  rect 43.49x53.39 smd paste+0 mask+0: 1(-27.59,0) 2(27.59,0)
  silkscreen extent -49,-44 49,44, body extent -53,-32 53,32, height 10
FP-CRCW0603-e3-IPC_A [mil]
  rect 44.69x41.82 smd paste+0 mask+0: 1(-32.1,0) 2(32.1,0)
  silkscreen extent -30,-37 30,37, body extent -74,-41 74,41, height 10
FP-CRCW0603-e3-IPC_B [mil]
  rect 36.81x37.88 smd paste+0 mask+0: 1(-28.17,0) 2(28.17,0)
  silkscreen extent -30,-37 30,35, body extent -56,-29 56,29, height 10
FP-CRCW0603-e3-MFG [mm]
  rect 0.75x1 smd paste+0 mask+0: 1(-0.75,0) 2(0.75,0)
  silkscreen extent -0.8,-0.9 0.8,0.9, body extent -1.22,-0.6 1.22,0.6, height 0.25
FP-CRCW0603-HPe3-IPC_A [mil]
  rect 45.6x41.82 smd paste+0 mask+0: 1(-32.56,0) 2(32.56,0)
  silkscreen extent -55,-37 55,37, body extent -75,-41 75,41, height 10
FP-CRCW0603-HPe3-MFG [mm]
  rect 0.75x1 smd paste+0 mask+0: 1(-0.75,0) 2(0.75,0)
  silkscreen extent -0.8,-0.9 0.8,0.9, body extent -1.22,-0.6 1.22,0.6, height 0.25
FP-CRGCQ0603-IPC_C [mil]
  rect 29.85x31.97 smd paste+0 mask+0: 1(-24.68,0) 2(24.68,0)
  silkscreen extent -40,-33 40,33, body extent -44,-22 44,22, height 10
FP-CRGP0805-IPC_C [mil]
  rect 35.67x51.57 smd paste+0 mask+0: 1(-30.55,0) 2(30.55,0)
  silkscreen extent -48,-43 48,43, body extent -52,-31 52,31, height 10
FP-DBV0006A-MFG [mm]
  rrect17% 1.1x0.6 smd paste+0 mask+0: 1(-1.3,0.95) 2(-1.3,0) 3(-1.3,-0.95) 4(1.3,-0.95) 5(1.3,0) 6(1.3,0.95)
  silkscreen extent -2.53,-1.53 0.35,1.53, body extent -1.95,-1.78 1.95,1.78, height 0.25
FP-DFN6-7946637-MFG [mm]
  round 0.405 smd paste+0 mask+0: 1(-1.3,0.95) 2(-1.321,0) 3(-1.321,-0.95) 4(1.3,-0.95) 5(1.321,0) 6(1.321,0.95)
  rect 1.75x2.5 smd paste+0 mask+0: 7(0,0)
  Top Layer region: -1.55,-0.725 -1.275,-0.725 -1.189,-0.742 -1.116,-0.791 -1.067,-0.864 -1.05,-0.95 -1.05,-0.95 -1.067,-1.036 -1.116,-1.109 -1.189,-1.158 -1.275,-1.175 -1.275,-1.175 -1.55,-1.175
  Top Layer region: -1.55,0.225 -1.275,0.225 -1.189,0.208 -1.116,0.159 -1.067,0.086 -1.05,0 -1.05,0 -1.067,-0.086 -1.116,-0.159 -1.189,-0.208 -1.275,-0.225 -1.275,-0.225 -1.55,-0.225
  Top Layer region: -1.55,1.175 -1.275,1.175 -1.189,1.158 -1.116,1.109 -1.067,1.036 -1.05,0.95 -1.05,0.95 -1.067,0.864 -1.116,0.791 -1.189,0.742 -1.275,0.725 -1.275,0.725 -1.55,0.725
  Top Layer region: 1.55,-1.175 1.275,-1.175 1.189,-1.158 1.116,-1.109 1.067,-1.036 1.05,-0.95 1.05,-0.95 1.067,-0.864 1.116,-0.791 1.189,-0.742 1.275,-0.725 1.275,-0.725 1.55,-0.725
  Top Layer region: 1.55,-0.225 1.275,-0.225 1.189,-0.208 1.116,-0.159 1.067,-0.086 1.05,0 1.05,0 1.067,0.086 1.116,0.159 1.189,0.208 1.275,0.225 1.275,0.225 1.55,0.225
  Top Layer region: 1.55,0.725 1.275,0.725 1.189,0.742 1.116,0.791 1.067,0.864 1.05,0.95 1.05,0.95 1.067,1.036 1.116,1.109 1.189,1.158 1.275,1.175 1.275,1.175 1.55,1.175
  silkscreen extent -2.25,-1.75 1.55,1.75, body extent -1.65,-1.65 1.65,1.65, height 0.25
FP-ESR03-IPC_A [mil]
  rect 45.6x39.85 smd paste+0 mask+0: 1(-32.56,0) 2(32.56,0)
  silkscreen extent -55,-36 55,36, body extent -75,-40 75,40, height 10
FP-FC0402-MFG [mm]
  rect 0.635x0.61 smd paste+0 mask+0: 1(-0.597,0) 2(0.597,0)
  silkscreen extent -0.64,-0.7 0.64,0.7, body extent -1.01,-0.44 1.01,0.44, height 0.25
FP-GRM21B-0_2-e0_2_0_7-IPC_B [mil]
  rect 49.4x57.33 smd paste+0 mask+0: 1(-32.51,0) 2(32.51,0)
  silkscreen extent -57,-44 57,44, body extent -67,-39 67,39, height 10
FP-GRM155-0_05-IPC_B [mil]
  rect 24.23x22.54 smd paste+0 mask+0: 1(-16.87,0) 2(16.87,0)
  silkscreen extent -29,-27 29,27, body extent -35,-17 35,17, height 10
FP-HSMG-C150-MFG [mm]
  rect 1.5x1.5 smd paste+0 mask+0: 1(-1.75,0) 2(1.75,0)
  silkscreen extent -0.6,-0.85 0.6,0.85, body extent -2.6,-0.95 2.6,0.95, height 0.25
FP-IHLP-1616BZ-FP_1_8545x-MFG [mil]
  rect 73.01x90 smd paste+0 mask+0: 1(-74.5,0) 2(74.5,0)
  silkscreen extent -85,-85 85,85, body extent -115,-89 115,89, height 10
FP-LQM18NN_00-IPC_B [mil]
  rect 39.63x37.73 smd paste+0 mask+0: 1(-28.58,0) 2(28.58,0)
  silkscreen extent -48,-35 48,35, body extent -58,-29 58,29, height 10
FP-LQW21HN_00-MFG [mm]
  rect 0.8x1.2 smd paste+0 mask+0: 1(-0.9,0) 2(0.9,0)
  silkscreen extent -0.13,-0.7 0.13,0.7, body extent -1.4,-0.8 1.4,0.8, height 0.25
FP-MABAES0060-MFG [mm]
  rect 1.4x0.76 smd paste+0 mask+0: 1(1.715,1.27) 2(1.715,0) 3(1.715,-1.27) 4(-1.715,-1.27) 5(-1.715,1.27)
  silkscreen extent -2.09,-2.09 3.18,2.09, body extent -2.51,-2.19 2.51,2.19, height 0.25
FP-MCU0805-IPC_C [mil]
  rect 29.87x51.5 smd paste+0 mask+0: 1(-32.55,0) 2(32.55,0)
  silkscreen extent 0,-28 0,28, body extent -51,-31 51,31, height 10
FP-MLZ2012-1_25-IPC_C [mil]
  rect 45.45x53.39 smd paste+0 mask+0: 1(-26.61,0) 2(26.61,0)
  silkscreen extent -49,-44 49,44, body extent -53,-32 53,32, height 10
FP-RMCF0603-IPC_B [mil]
  rect 39.61x37.73 smd paste+0 mask+0: 1(-27.6,0) 2(27.6,0)
  silkscreen extent -47,-35 47,35, body extent -57,-29 57,29, height 10
FP-SMA-J-P-H-ST-EM1-MFG [mm]
  rect 1.27x3.6 smd paste+0 mask+0: 1(0,6.66)
  rect 1.35x4.2 smd paste+0 mask+0: 2(-2.825,6.86) 3(2.825,6.86)
  rect 1.35x4.2 smd far side paste+0 mask+0: 4(-2.825,6.86) 5(2.825,6.86)
  silkscreen extent -3.9,5.5 3.9,9.48, body extent -3.6,-4.92 3.6,9.06, height 0.25
FP-TFCR0805-IPC_A [mil]
  rect 53.38x59.38 smd paste+0 mask+0: 1(-37.45,0) 2(37.45,0)
  silkscreen extent -64,-45 64,45, body extent -84,-49 84,49, height 10
LT-DE-UE-12_V [mm] "SON, 12-Leads, Body 4x3mm, Pitch 0.5mm, Thermal Pad 3.3x1.7mm"
  rect 0.7x0.25 smd: 1(-1.45,1.25) 2(-1.45,0.75) 3(-1.45,0.25) 4(-1.45,-0.25) 5(-1.45,-0.75) 6(-1.45,-1.25) 7(1.45,-1.25) 8(1.45,-0.75) 9(1.45,-0.25) 10(1.45,0.25) 11(1.45,0.75) 12(1.45,1.25)
  rect 1.7x3.3 smd: 13(0,0)
  silkscreen extent -2,-2.05 1.55,2.1, body extent -1.5,-2 1.5,2, height 0.8
QFN51P300X300X89-13N [mm]
  rect 0.85x0.3 smd: 1(-1.45,0.51) 2(-1.45,0) 3(-1.45,-0.51) 7(1.45,-0.51) 8(1.45,0) 9(1.45,0.51)
  rect 0.3x0.85 smd: 4(-0.51,-1.45) 5(0,-1.45) 6(0.51,-1.45) 10(0.51,1.45) 11(0,1.45) 12(-0.51,1.45)
  rect 1.45x1.45 smd: 13(0,0)
  silkscreen extent -2,1.15 -1.75,1.4, body extent -1.5,-1.5 1.5,1.5, height 0.89
QFP50P1200X1200X120-64N [mm]
  rrect25% 1.56x0.28 smd: 1(-5.68,3.75) 2(-5.68,3.25) 3(-5.68,2.75) 4(-5.68,2.25) 5(-5.68,1.75) 6(-5.68,1.25) 7(-5.68,0.75) 8(-5.68,0.25) 9(-5.68,-0.25) 10(-5.68,-0.75) 11(-5.68,-1.25) 12(-5.68,-1.75) 13(-5.68,-2.25) 14(-5.68,-2.75) 15(-5.68,-3.25) 16(-5.68,-3.75) 33(5.68,-3.75) 34(5.68,-3.25) 35(5.68,-2.75) 36(5.68,-2.25) 37(5.68,-1.75) 38(5.68,-1.25) 39(5.68,-0.75) 40(5.68,-0.25) 41(5.68,0.25) 42(5.68,0.75) 43(5.68,1.25) 44(5.68,1.75) 45(5.68,2.25) 46(5.68,2.75) 47(5.68,3.25) 48(5.68,3.75)
  rrect25% 0.28x1.56 smd: 17(-3.75,-5.68) 18(-3.25,-5.68) 19(-2.75,-5.68) 20(-2.25,-5.68) 21(-1.75,-5.68) 22(-1.25,-5.68) 23(-0.75,-5.68) 24(-0.25,-5.68) 25(0.25,-5.68) 26(0.75,-5.68) 27(1.25,-5.68) 28(1.75,-5.68) 29(2.25,-5.68) 30(2.75,-5.68) 31(3.25,-5.68) 32(3.75,-5.68) 49(3.75,5.68) 50(3.25,5.68) 51(2.75,5.68) 52(2.25,5.68) 53(1.75,5.68) 54(1.25,5.68) 55(0.75,5.68) 56(0.25,5.68) 57(-0.25,5.68) 58(-0.75,5.68) 59(-1.25,5.68) 60(-1.75,5.68) 61(-2.25,5.68) 62(-2.75,5.68) 63(-3.25,5.68) 64(-3.75,5.68)
  silkscreen extent -7.54,-5 5,5, body extent -6,-6 6,6, height 1.2
RESC0603(1608)_N [mm] "Chip Resistor, Body 1.6x0.8mm, IPC Medium Density"
  rect 0.9x1 smd: 1(-0.8,0) 2(0.8,0)
  silkscreen extent -0.05,-0.4 0.05,0.4, body extent -0.85,-0.47 0.85,0.47, height 0.6
RESC2013X50X30ML20T20 [mm] "Chip Resistor, 2-Leads, Body 2.00x1.25mm, IPC Low Density"
  rect 1.25x1.55 smd: 1(-1.025,0) 2(1.025,0)
  silkscreen extent -0.1,-0.67 0.1,0.67, body extent -1.1,-0.72 1.1,0.72, height 0.5
SMTC-TSW-102-08-X-S-RA [mm] ".025 SQ Post Terminal Strip Assembly, 1x2 Pins, Right Angle, 2.54mm Pitch, Male"
  rect 1.55x1.55 hole 1.02: 1(0,0)
  round 1.55 hole 1.02: 2(2.54,0)
  silkscreen extent -1.46,1.52 4,4.06, body extent -1.27,-0.32 3.81,9.9, height 3.05
SOT65P210X110-6N [mm]
  rect 0.95x0.4 smd: 1(-1,0.65) 2(-1,0) 3(-1,-0.65) 4(1,-0.65) 5(1,0) 6(1,0.65)
  silkscreen extent -1.48,-1 0.18,1.2
WE-SPXO_CFPS-39 [mm] "Simple Packaged Quartz Oscillator, body 3.2x2.5mm"
  rect 1.4x1 smd: 1(-1.1,-0.8) 2(1.1,-0.8) 3(1.1,0.8) 4(-1.1,0.8)
  silkscreen extent -2.42,-1.12 -2.17,-0.88, body extent -1.6,-1.25 1.6,1.25, height 1.05
WL-SMCW_1206_150120xx75000 [mm] "SMD Mono-color Chip LED, body 3.2x1.6mm"
  rect 1.4x1.6 smd: 1(-1.5,0) 2(1.5,0)
  silkscreen extent -2.6,-0.75 -2.4,0.75, body extent -1.6,-0.8 1.6,0.8, height 0.68

## Part data
C1 C3 C6 C17 C18 C20 C29: library part CMP-2000-04979-3, "Multilayer Ceramic Capacitors 10μF ±10% 10V X5R SMD 0603", Capacitance=10uF, Case Code (Imperial)=0603, Case Code (Metric)=1608, Dielectric=X5R, Dielectric Material=Ceramic, Max Operating Temperature=85°C, Min Operating Temperature=-55°C, Package Quantity=1, Tolerance=10%, Voltage=10V, Case/Package=0603, Construction=Flat, Depth=0.8mm, Height=0.8mm, Lead Free="Lead Free", Length=1.6mm, Mount="Surface Mount", Number of Pins=2, Packaging="Tape and Reel", Radiation Hardening=No, REACH SVHC="No SVHC", Resistor Type=Ceramic, RoHS Compliant=Yes, Series=C, Termination=SMD/SMT, Thickness=0.035inch, Voltage Rating=10V, Voltage Rating (DC)=10V, Weight=7.1E-05oz, Width=0.8mm
C2 C5 C13 C14 C15 C16 C21 C30: library part CMP-2006-01211-1, Manufacturer=Vitramon, Part Number=VJ0603Y104KXJAP
C4 C35: library part CMP-03422-001497-1, "CAP CER 22UF 25V X5R 0805", Capacitance=22uF, Case Code (Imperial)=0805, Case Code (Metric)=2012, Dielectric=X5R, Max Operating Temperature=85°C, Min Operating Temperature=-55°C, Package Quantity=3000, Tolerance=20%, Voltage Rating=25V, Case/Package=0805, Halogen Free="Halogen Free", Height=1.25mm, Lead Free="Lead Free", Length=0.079inch, Mount="Surface Mount", Packaging="Tape and Reel", RoHS Compliant=Yes, Termination=SMD/SMT, Thickness=0.057inch, Voltage Rating (DC)=25V, Weight=0.000194oz, Width=0.049inch
C7 C19 C22 C25 C26 C27 C31 C43: library part CMP-2000-06025-2, "Multilayer Ceramic Capacitors 1μF ±10% 50V X5R SMD 0603", Capacitance=1uF, Case Code (Imperial)=0603, Case Code (Metric)=1608, Dielectric=X5R, Dielectric Material=Ceramic, Max Operating Temperature=85°C, Min Operating Temperature=-55°C, Package Quantity=1, Tolerance=10%, Voltage=50V, Case/Package=0603, Construction=Flat, Depth=0.8mm, Height=0.8mm, Lead Free="Lead Free", Length=1.6mm, Mount="Surface Mount", Number of Pins=2, Packaging="Tape and Reel", Radiation Hardening=No, REACH SVHC="No SVHC", Resistor Type=Ceramic, RoHS Compliant=Yes, Series=C, Termination=SMD/SMT, Thickness=0.035inch, Voltage Rating=50V, Voltage Rating (DC)=50V, Weight=7.1E-05oz, Width=0.031inch
C8 C44: library part CMP-2006-03564-1, Manufacturer=Kemet, Part Number=C0603C331J5GALTU
C9 C45: library part CMP-2006-02012-1, Manufacturer=Vitramon, Part Number=VJ0603A100KXAAC
C10 C55: library part CMP-08246-004908-1, "Multilayer Ceramic Capacitors 4.7μF ±10% 25V X5R SMD 0805", Capacitance=4.7uF, Case Code (Imperial)=0805, Case Code (Metric)=2012, Dielectric=X5R, Dielectric Material=Ceramic, Max Operating Temperature=85°C, Min Operating Temperature=-55°C, Package Quantity=1, Tolerance=10%, Voltage=25V, Case/Package=0805, Depth=1.25mm, Height=1.25mm, Lead Free="Lead Free", Length=2mm, Mount="Surface Mount", Number of Pins=2, Packaging="Tape and Reel", Radiation Hardening=No, REACH SVHC="No SVHC", Resistor Type=Ceramic, RoHS Compliant=Yes, Termination=SMD/SMT, Thickness=0.057inch, Voltage Rating=25V, Voltage Rating (DC)=25V, Weight=0.000194oz, Width=1.25mm
C11 C47: library part CMP-03020-034654-1, "CAP CER 10UF 10V X5R 0603", RoHS Compliant=Yes
C12 C48: library part CMP-03020-014723-2, "CAP CER 100PF 16V NP0 0603", Capacitance="100 pF", Manufacturer=KEMET, Package=C0603C-CF, Temperature="-55°C to +125°C", Temperature Characteristic=C0G, Temperature Coefficient=30ppm/°C, Temperature Range High=+125°C, Temperature Range Low=-55°C, Tolerance=0.1, Voltage Rating="16 V", Automotive=Yes, Automotive Grade="Grade 1", Category=Cap, ComponentLink2Description=Datasheet, ComponentLink2URL=https://api.kemet.com/component-edge/download/datasheet/C0603C100J5GACAUTO.pdf, Device Class L1="Passive Components", Device Class L2=Capacitors, Device Class L3="Ceramic Capacitors", Digikey Description="CAP CER 100PF 16V NP0 0603", Height=0.87mm, Lead Free=Yes, Manufacturer Part Number=C0603C101K4GAC7867, Material=Ceramic, Octopart=https://octopart.com/c0603c101k4gac7867-kemet-1494535, RoHS=TRUE
C23: library part CMP-2006-01561-1, Manufacturer=Vitramon, Part Number=VJ0603Y152JXACW1BC
C24: library part CMP-2006-04440-1, Manufacturer="AVX Interconnect / Elco", Part Number=06035C472KAZ2A
C28 C61 C62 C63 C64 C65 C66 C67 C68 C69 C70: library part CMP-06035-052658-1, "Chip Multilayer Ceramic Capacitors for General Purpose, 0805, 100uF, X5R, 15%, 20%, 6.3V", Capacitance=100uF, Dielectric=X5R, Tolerance=20%, Voltage Rating (DC)=6.3V, Lead Free="Lead Free", Length=2mm, Thickness=1.25mm, Width=1.25mm
C32 C33 C34: library part CMP-2006-01326-1, Manufacturer=Vitramon, Part Number=VJ0603Y183KXAAC
C36 C37: library part CMP-2008-04639-2, "Chip Multilayer Ceramic Capacitors for General Purpose, 0402, 0.10uF, X7R, 15%, 10%, 50V", Capacitance=100nF, Case Code (Imperial)=0402, Case Code (Metric)=1005, Dielectric=X7R, Dielectric Material=Ceramic, Max Operating Temperature=125°C, Min Operating Temperature=-55°C, Package Quantity=10000, Tolerance=10%, Voltage=50V, Case/Package=0402, Depth=0.5mm, Dissipation Factor=0.025%, Height=0.5mm, Lead Free="Lead Free", Length=1mm, Material=Ceramic, Mount="Surface Mount", Packaging="Tape and Reel", REACH SVHC="No SVHC", Resistor Type=Ceramic, Termination=SMD/SMT, Thickness=0.022inch, Voltage Rating=50V, Voltage Rating (DC)=50V, Weight=0.000212oz, Width=0.5mm
C38 C39 C40: library part CMP-2008-04254-2, "Chip Multilayer Ceramic Capacitors for General Purpose, 0402, 1000pF, C0G, 30ppm/°C, 5%, 50V", Capacitance=1nF, Case Code (Imperial)=0402, Case Code (Metric)=1005, Dielectric=C0G, Dielectric Material=Ceramic, Insulation Resistance=10GR, Max Operating Temperature=125°C, Min Operating Temperature=-55°C, Package Quantity=1, Temperature Coefficient=30ppm/°C, Tolerance=5%, Voltage=50V, Case/Package=0402, Depth=0.5mm, Height=0.5mm, Lead Free="Lead Free", Length=1mm, Material=Ceramic, Mount="Surface Mount", Number of Pins=2, Packaging="Tape and Reel", Radiation Hardening=No, REACH SVHC="No SVHC", Termination=SMD/SMT, Thickness=0.022inch, Voltage Rating=50V, Voltage Rating (DC)=50V, Width=0.5mm
C41 C42: library part CMP-1034-00010-2, Manufacturer=Murata, Part Number=GRM1555C1HR40WA01D
D1: library part CMP-1426-00017-3, "Led, Red, 630 Nm, 1.9 V, 30 Ma, 60 Mcd Rohs Compliant: Yes", Case Code (Imperial)=1206, Case Code (Metric)=3216, Color=Red, Forward Current=100mA, Forward Voltage=1.9V, Max Operating Temperature=85°C, Max Reverse Voltage (DC)=5V, Min Operating Temperature=-40°C, Test Current=20mA, Case/Package=1206, Dominant Wavelength=630nm, Height=680µm, Length=3.2mm, Lens Style="Clear, Rectangular", Luminous Intensity=60mcd, Mount="Surface Mount", Packaging="Tape and Reel", Peak Wavelength=645nm, REACH SVHC=Unknown, RoHS=Compliant, Viewing Angle=140°, Wavelength=630nm, Width=1.6mm
D2: library part CMP-2000-05061-2, "LED GREEN DIFFUSED 1206 SMD", Colour=Green, Forward Current=20mA, Forward Voltage=2.2V, Manufacturer=Broadcom, Max Junction Temp=+95°C, Power Dissipation=65mW, Reverse Voltage=5V, Temperature="-40°C to +85°C", Temperature Range High=+85°C, Temperature Range Low=-40°C, Automotive=No, Category=Diode, ComponentLink2Description=Datasheet, ComponentLink2URL=https://docs.broadcom.com/docs/AV02-0551EN, Device Class L1=Optoelectronics, Device Class L2=LEDs, Device Class L3=unset, Digikey Description="LED GREEN DIFFUSED 1206 SMD", Height=1.2mm, Ipc Land Pattern Name=DIOCP320160X55, Lead Free=Yes, Led Orientation="Top View", Luminous Intensity=15mcd, Manufacturer Part Number=HSMG-C150, Mouser Description="LED Uni-Color Green 570nm 2-Pin Chip LED T/R", Octopart=https://octopart.com/hsmg-c150-broadcom-71131304, Package=HSMG-C150, Peak Emmision Wavelength=570nm, RoHS=TRUE, Viewing Angle=170°, Wavelength=572nm
J1 J2 J8: library part CMP-1502-01419-3, Color=Black, Contact Resistance=20mΩ, Current Rating=3A, Flammability Rating="UL94 V-0", Insulation Resistance=1GΩ, Max Operating Temperature=125°C, Min Operating Temperature=-40°C, Operating Supply Voltage=250V, Connector Type="Header, Socket", Contact Gender=Female, Contact Material=Copper, Contact Plating=Gold, Gender=Female, Height=8.5mm, Housing Material=PBT, Insulation=Insulated, Lead Pitch=2.54mm, Length=25.9mm, Mount="Through Hole", NexarPartId=18818161, Number of Contacts=10, Number of Pins=10, Number of Positions=10, Number of Rows=1, Pitch=2.54mm, REACH SVHC=Unknown, RoHS=Compliant, Termination="Through Hole", Voltage Rating=250V, Width=25.9mm
J3 J4 J5 J6 J7: library part CMP-02754-000006-1, "CONN SMA JACK STR 50OHM EDGE MNT", Case/Package=SMA, Dielectric Material=PTFE, Housing Color=Gold, Max Frequency=6GHz, Max Operating Temperature=125°C, Min Operating Temperature=-65°C, Package Quantity=1, Voltage Rating=335V, Body Material=Brass, Body Plating=Gold, Center Contact Plating=Gold, Connector Type=SMA, Contact Material=Copper, Contact Plating=Gold, Depth=13.33mm, Fastening Type=Threaded, Impedance=50R, Insulation Material=Polytetrafluoroethylene, Length=6.35mm, Mount=Edge, Orientation=Straight, Packaging=Tray, Radiation Hardening=No, RoHS Compliant=Yes, Series=SMA, Termination=Solder
L1 L5: library part CMP-02424-000576-1, "Fixed Inductors Commercial Low DCR Series SMT 4.7uH 1.7A 105mΩ 20%", Case/Package=1616, Current Rating=1.7A, DC Resistance (DCR)=105mR, Inductance=4.7uH, Inductance Tolerance=20%, Max Operating Temperature=125°C, Min Operating Temperature=-55°C, Package Quantity=4000, Saturation Current=1.75A, Self Resonant Frequency=29MHz, Test Frequency=100kHz, Contact Plating=Tin, Core Material=Ferrite, Depth=4.31mm, Height=2mm, Height - Seated (Max)=0.079inch, Lead Free="Lead Free", Length=4.7mm, Max DC Current=1.7A, Military Standard=Not, Mount="Surface Mount", Number of Pins=1616, Packaging="Tape and Reel", Radiation Hardening=No, RMS Current (Irms)=1.7A, Shielding=Shielded, Termination=SMD/SMT, Tolerance=20%, Width=4.06mm
L2: library part CMP-06042-016197-1, "Multilayer Type Inductor for General Circuits, 0603 (1608), 820nH, 10%, 2.1Ω, 35mA", Case Code (Imperial)=0603, Case Code (Metric)=1608, Current Rating=35mA, DC Resistance (DCR)=2.1R, Inductance=820nH, Max Operating Temperature=85°C, Min Operating Temperature=-40°C, Package Quantity=1, Self Resonant Frequency=85MHz, Test Frequency=25MHz, Tolerance=10%, Case/Package=0603, Core Material=Ferrite, DC Current=35mA, Depth=0.95mm, Height=0.8mm, Height - Seated (Max)=0.037inch, Lead Free="Lead Free", Length=1.6mm, Max DC Current=35mA, Military Standard=Not, Mount="Surface Mount", Packaging="Tape and Reel", Q Factor=15, Radiation Hardening=No, REACH SVHC="No SVHC", RoHS Compliant=Yes, Series=LQM18N, Shielding=Shielded, Termination=SMD/SMT, Width=0.031inch
L3: library part CMP-06042-001639-1, "0805LS-152XJEC Coilcraft", Case Code (Imperial)=0805, Case Code (Metric)=2012, Current Rating=85mA, DC Resistance (DCR)=5.33R, Inductance=1.5uH, Max Operating Temperature=85°C, Min Operating Temperature=-40°C, Package Quantity=3000, Resistor Type=Wirewound, Self Resonant Frequency=350MHz, Test Frequency=10MHz, Tolerance=5%, Case/Package=0805, Core Material=Ferrite, DC Current=85mA, Depth=1.4mm, Height=0.9mm, Height - Seated (Max)=0.039inch, Length=2mm, Max DC Current=85mA, Military Standard=Not, Mount="Surface Mount", Packaging="Tape and Reel", Q Factor=35, Radiation Hardening=No, Shielding=Unshielded, Termination=SMD/SMT, Weight=0.000282oz, Width=0.047inch
L4: library part CMP-06042-001639-1, "Wire Wound Ferrite type RF Inuctor 1.5uH ±5% 85mA 5.33Ω 0805 (2012)", Case Code (Imperial)=0805, Case Code (Metric)=2012, Current Rating=85mA, DC Resistance (DCR)=5.33R, Inductance=1.5uH, Max Operating Temperature=85°C, Min Operating Temperature=-40°C, Package Quantity=3000, Resistor Type=Wirewound, Self Resonant Frequency=350MHz, Test Frequency=10MHz, Tolerance=5%, Case/Package=0805, Core Material=Ferrite, DC Current=85mA, Depth=1.4mm, Height=0.9mm, Height - Seated (Max)=0.039inch, Length=2mm, Max DC Current=85mA, Military Standard=Not, Mount="Surface Mount", Packaging="Tape and Reel", Q Factor=35, Radiation Hardening=No, Shielding=Unshielded, Termination=SMD/SMT, Weight=0.000282oz, Width=0.047inch
L14 L16 L17: library part CMP-08253-000383-1, "Shielded Multilayer Inductor 1uH ±20% 800mA 130mΩ AEC-Q200 SMD 0805", Case Code (Imperial)=0805, Case Code (Metric)=2012, Current Rating=800mA, DC Resistance (DCR)=130mR, Inductance=1uH, Max Operating Temperature=125°C, Min Operating Temperature=-55°C, Package Quantity=2000, Ratings=AEC-Q200, Saturation Current=700mA, Test Frequency=2MHz, Tolerance=20%, Case/Package=0805, Core Material=Ferrite, Height=1.25mm, Height - Seated (Max)=0.057inch, Length=0.079inch, Max DC Current=800mA, Mount="Surface Mount", Packaging="Tape and Reel", RoHS Compliant=Yes, Shielding=Shielded, Termination=SMD/SMT, Weight=0.000194oz, Width=0.049inch
L15: library part CMP-97513-000003-1, "BALUN 300KHZ-200MHZ 1:1 6SMD", Case/Package=SMD/SMT, Max DC Current=500mA, Max Operating Temperature=85°C, Min Operating Temperature=-40°C, Package Quantity=2000, Power Rating=500mW, Depth=3.81mm, Height=2.67mm, Insertion Loss=1.5dB, Lead Free="Lead Free", Lead/Base Style="Gull Wing", Length=3.81mm, Mount="Surface Mount", Number of Pins=5, Packaging="Tape and Reel", Radiation Hardening=No, Termination=SMD/SMT, Turns Ratio=1:1, Width=3.81mm
P1 P3: library part CMP-1024-00320-1, "0.025\" SQ Post Header, Through-hole, Right Angle, -55 to 125 degC, 2.54 mm Pitch, 2-Pin, Male, RoHS", Manufacturer=Samtec, Temperature Range="-55 to 125 degC", ComponentLink1Description="Manufacturer URL", ComponentLink1URL=http://www.samtec.com, ComponentLink2Description=Datasheet, ComponentLink2URL=http://www.samtec.com/documents/webfiles/pdf/TSW_TH.PDF, ComponentLink3Description="Package Specification", ComponentLink3URL=http://www.samtec.com/documents/webfiles/cpdf/TSW-XXX-XX-XXX-X-XX-XXX-MKT.pdf, DatasheetVersion=F-214, Mounting Technology=Through-hole, Orientation="Right Angle", PackageDescription=".025[0.64] SQ. Post Terminal Strip Assembly", PackageReference=TSW-102-08-X-S-RA, PackageVersion="DM, 8/1988", PartNumber=TSW-102-08-G-S-RA, Pitch="2.54 mm", RoHS=True
R1 R24 R26 R27 R28 R30 R35 R36 R43 R44 R61: library part CMP-03211-009884-1, "CRGCQ 0603 10K 5%", Ambient Temperature Range High=+70°C, Manufacturer="TE Connectivity", Package=CRGCQ0603, Power Rating=0.1W, Resistance=10KΩ, Temperature="-55°C to +155°C", Temperature Coefficient=±100ppm/°C, Temperature Range High=+155°C, Temperature Range Low=-55°C, Tolerance=0.05, Voltage Rating=75V, Category=Res, ComponentLink2Description=Datasheet, ComponentLink2URL=https://www.te.com/commerce/DocumentDelivery/DDEController?Action=showdoc&DocId=Data+Sheet%7F1773204-3%7F1%7Fpdf%7FEnglish%7FENG_DS_1773204-3_1.pdf%7F4-2176339-923, Composition="Thick Film", Device Class L1="Passive Components", Device Class L2=Resistors, Device Class L3="Chip SMD Resistors", Digikey Description="CRGCQ 0603 10K 5%", Height=0.55mm, Ipc Land Pattern Name=RESC16080X45, Lead Free=Yes, Manufacturer Part Number=CRGCQ0603J10K, Mouser Description="Res Thick Film 0603 10K Ohm 5% 0.1W(1/10W) ±100ppm/C Pad SMD Automotive T/R", Octopart=https://octopart.com/crgcq0603j10k-te+connectivity-91018097, RoHS=TRUE, Series=CRGCQ
R2: library part CMP-08839-028747-1, "3.3kΩ ±1% 0.25W 0603 Anti-Surge Chip Resistor AEC-Q200", Case/Package=0603, Max Operating Temperature=155°C, Max Power Dissipation=250mW, Min Operating Temperature=-55°C, Resistance=3.3kR, Resistor Type="Thick Film", Temperature Coefficient=100ppm/°C, Tolerance=1%, Features="Automotive AEC-Q200", Number of Terminations=2, Packaging="Tape and Reel", RoHS Compliant=Yes, Series=ESR
R3: library part CMP-2000-03018-2, "RES 111K OHM 0.5% 1/10W 0603", Case Code (Imperial)=0603, Case Code (Metric)=1608, Max Operating Temperature=155°C, Max Power Dissipation=100mW, Min Operating Temperature=-55°C, Package Quantity=10, Resistance=1.02MR, Temperature Coefficient=100ppm/°C, Tolerance=1%, Voltage Rating=75V, Case/Package=0603, Composition="Thick Film", Contact Plating=Tin, Depth=0.85mm, Features="Automotive AEC-Q200", Height=0.02inch, Lead Free="Lead Free", Length=1.55mm, Military Standard=Not, Mount="Surface Mount", Number of Terminations=2, Packaging="Tape and Reel", Power Rating=100mW, Radiation Hardening=No, Termination=SMD/SMT, Voltage Rating (DC)=75V, Weight=7.1E-05oz, Width=0.033inch
R4 R8 R9 R10 R11 R12 R13 R14 R15 R16 R17 R18 R19 R25 R29 R31 R37 R41 R45 R46 R48 R51 R53 R54 R56 R57 R58 R59 R60 R62 R63: library part CMP-26527-006412-1, "0Ω ±0 0.1W 0603 Thick Film Chip Resistor AEC-Q200 compliant", Case/Package=0603, Max Operating Temperature=155°C, Max Power Dissipation=100mW, Min Operating Temperature=-55°C, Resistance=0R, Resistor Type="Thick Film", Contact Plating=Tin, Features="Automotive AEC-Q200", Height=0.022inch, Length=0.061inch, Mount="Surface Mount", Number of Terminations=2, Packaging="Tape and Reel", Radiation Hardening=No, RoHS Compliant=Yes, Series=RMCF, Width=0.031inch
R5 R39: library part CMP-2000-03475-2, "RES Thick Film, 57.6kΩ, 1%, 0.1W, 100ppm/°C, 0603", Case Code (Imperial)=0603, Case Code (Metric)=1608, Max Operating Temperature=155°C, Max Power Dissipation=100mW, Min Operating Temperature=-55°C, Package Quantity=10, Resistance=57.6kR, Temperature Coefficient=100ppm/°C, Tolerance=1%, Voltage Rating=75V, Case/Package=0603, Composition="Thick Film", Contact Plating=Tin, Depth=0.85mm, Features="Automotive AEC-Q200", Height=0.45mm, Length=1.55mm, Military Standard=Not, Number of Pins=2, Number of Terminations=2, Packaging="Tape and Reel", Power Rating=100mW, Radiation Hardening=No, Termination=SMD/SMT, Weight=7.1E-05oz, Width=0.85mm
R6: library part CMP-03412-022585-2, "RES 11.3KΩ 1.00% 0.1W 0603", RoHS Compliant=Yes
R7 R40: library part CMP-02407-006337-1, "RES Thick Film, 86.6kΩ, 1%, 0.33W, 100ppm/°C, 0603", Case/Package=0603, Max Power Dissipation=250mW, Package Quantity=5000, Resistance=86.6kR, Temperature Coefficient=100ppm/°C, Tolerance=1%, Composition="Thick Film", Features="Automotive AEC-Q200", Height=0.022inch, Lead Free="Lead Free", Length=0.063inch, Number of Terminations=2, Packaging="Tape and Reel", Width=0.033inch
R20 R22: library part CMP-1012-00736-1, "100K 0.1W 1% 0603 (1608 Metric)  SMD", Case-EIA=0603, Case-Metric=1608, Power="0.1 W", Tolerance="1 %", Technology=SMT
R21 R23: library part CMP-03412-037249-1, "RES SMD 82 OHM 5% 1/8W 0805", Manufacturer=Yageo, Package=AC0805, Power Rating=1/8W, Resistance=82Ω, Temperature="-55°C to +155°C", Temperature Range High=+155°C, Temperature Range Low=-55°C, Tolerance=0.05, Voltage Rating=150V, Automotive=Yes, Automotive Grade="Grade 0", Category=Res, ComponentLink2Description=Datasheet, ComponentLink2URL=http://www.yageo.com/documents/recent/PYu-AC_51_RoHS_L_6.pdf, Composition="Thick Film", Device Class L1="Passive Components", Device Class L2=Resistors, Device Class L3="Chip SMD Resistors", Digikey Description="RES SMD 82 OHM 5% 1/8W 0805", Footprint Url=http://www.yageo.com/exep/pages/download/literatures/PYu-R_Mount_10.pdf, Height=0.6mm, Ipc Land Pattern Name=RESC200125X50, Lead Free=Yes, Manufacturer Part Number=AC0805JR-0782RL, Mouser Description="Thick Film Resistors - SMD 1/8W 82ohm 5% AEC-Q200", Octopart=https://octopart.com/ac0805jr-0782rl-yageo-71367939, RoHS=TRUE, Series=AC
R32 R33: library part CMP-2001-04239-1, Manufacturer="Vishay Dale", Part Number=CRCW08055K00FKTA
R34: library part CMP-2100-03695-1, "Trimming Potentiometer, 10000 Ohm, -40 to 100 degC, 3-Pin SMD, RoHS, Tape and Reel", Case/Package=SMD/SMT, Colour=Silver, Manufacturer=Bourns, Max Operating Temperature=100degC, Max Power Dissipation=100mW, Min Operating Temperature=-40degC, Package Description="3-Pin Surface Mount Device, Body 3.8 x 3.6 mm", Package Quantity=2500, Package Reference=TC33X-2, Resistance=10KOhm, Temperature Coefficient=250ppm/degreesC, Tolerance=25%, Voltage Rating (DC)=50V, Composition=Potentiometer, Contact Plating=Silver, Datasheet URL=http://www.bourns.com/docs/Product-Datasheets/TC33.pdf, Datasheet Version=42583.0, Depth=3.8mm, Height=0.047inch, Lead Free=LeadFree, Length=3mm, Manufacturer URL=http://www.bourns.com/, Military Standard=Not, Mount=SurfaceMount, Number of Turns=1, Packaging=TapeandReel, Power Rating=100mW, Radiation Hardening=No, REACH SVHC=NoSVHC, RoHSCompliant=true, Taper=Linear, Termination=FootPrint, Weight=29.4mg, Width=0.118inch
R38: library part CMP-02407-000931-1, "RES 1.05K OHM 0.5% 1/5W 0805", Case/Package=0805, Max Operating Temperature=125°C, Min Operating Temperature=-55°C, Resistance=51R, Temperature Coefficient=50ppm/°C, Tolerance=1%, Composition="Thin Film", Contact Plating=Tin, Height=450um, Lead Free="Lead Free", Length=2mm, Radiation Hardening=No, Width=1.25mm
R42: library part CMP-2000-03016-2, "RES Thick Film, 1MΩ, 5%, 0.1W, 200ppm/°C, 0603", Case Code (Imperial)=0603, Case Code (Metric)=1608, Max Operating Temperature=155°C, Max Power Dissipation=100mW, Min Operating Temperature=-55°C, Package Quantity=1, Resistance=1MR, Temperature Coefficient=200ppm/°C, Tolerance=5%, Voltage Rating=75V, Case/Package=0603, Composition="Thick Film", Contact Plating=Tin, Depth=0.85mm, Features="Automotive AEC-Q200", Height=0.02inch, Length=1.55mm, Military Standard=Not, Mount="Surface Mount", Number of Pins=2, Number of Terminations=2, Packaging="Tape and Reel", Power Rating=100mW, Radiation Hardening=No, Termination=SMD/SMT, Weight=7.1E-05oz, Width=0.85mm
R47: library part CMP-05494-120702529-1, "FCHP0402E50R0BBT1 SMD Chip Resistor, 50 Ohm, ± 0.1%, 1 W, 0402 [1005 Metric], Thin Film, High Frequency", Case/Package=0402, Max Operating Temperature=155°C, Min Operating Temperature=-55°C, Power Rating=1W, Resistance=50Ω, Temperature Coefficient=25ppm/°C, Tolerance=0.1%, Voltage Rating=30V, Composition="Thin Film", Height=419.1µm, NexarPartId=120702529, Schedule B=8533210045
R49: library part CMP-250906-237835-1, "RES Thin Film,  42.2kΩ, 0.1%, 0.1W, 25ppm/°C, 0805"
R50 R55: library part CMP-02407-003593-1, "RES Thick Film, 220Ω, 1%, 0.33W, 100ppm/°C, 0603", Case Code (Imperial)=0603, Case Code (Metric)=1608, Max Operating Temperature=155°C, Max Power Dissipation=250mW, Min Operating Temperature=-55°C, Package Quantity=5000, Resistance=220R, Temperature Coefficient=100ppm/°C, Tolerance=1%, Voltage Rating=75V, Case/Package=0603, Composition="Thick Film", Contact Plating=Tin, Depth=0.85mm, Features="Automotive AEC-Q200", Height=0.45mm, Lead Free="Lead Free", Length=1.6mm, Military Standard=Not, Mount="Surface Mount", Number of Terminations=2, Packaging="Tape and Reel", Power Rating=250mW, Radiation Hardening=No, Termination=SMD/SMT, Voltage Rating (DC)=75V, Weight=7.1E-05oz, Width=0.033inch
R52: library part CMP-03211-006861-1, "CRGP 0805 10K 1%", Ambient Temperature Range High=+70°C, Manufacturer=TE, Package=CRGP0805, Power Rating=0.33W, Resistance=10KΩ, Temperature="-55°C to +155°C", Temperature Coefficient=±100ppm/°C, Temperature Range High=+155°C, Temperature Range Low=-55°C, Tolerance=0.01, Voltage Rating=150V, Automotive=No, Category=Res, ComponentLink2Description=Datasheet, ComponentLink2URL=https://www.mouser.com/datasheet/2/418/NG_DS_9-1773463-9_A-1358566.pdf, Composition="Thick Film", Device Class L1="Passive Components", Device Class L2=Resistors, Device Class L3="Chip SMD Resistors", Digikey Description="CRGP 0805 10K 1%", Height=0.65mm, Ipc Land Pattern Name=RESC200125X55, Lead Free=Yes, Manufacturer Part Number=CRGP0805F10K, Octopart=https://octopart.com/crgp0805f10k-te+connectivity-91018782, RoHS=TRUE, Series=CRGP
SW1: library part CMP-03913-146831046-1, "Ws-slsv_smt Mini Slide Switch Sa"